# EAGLE board RGB_Station_v10_FusionPannel (EAGLE 7.7.0), part 1 of 2
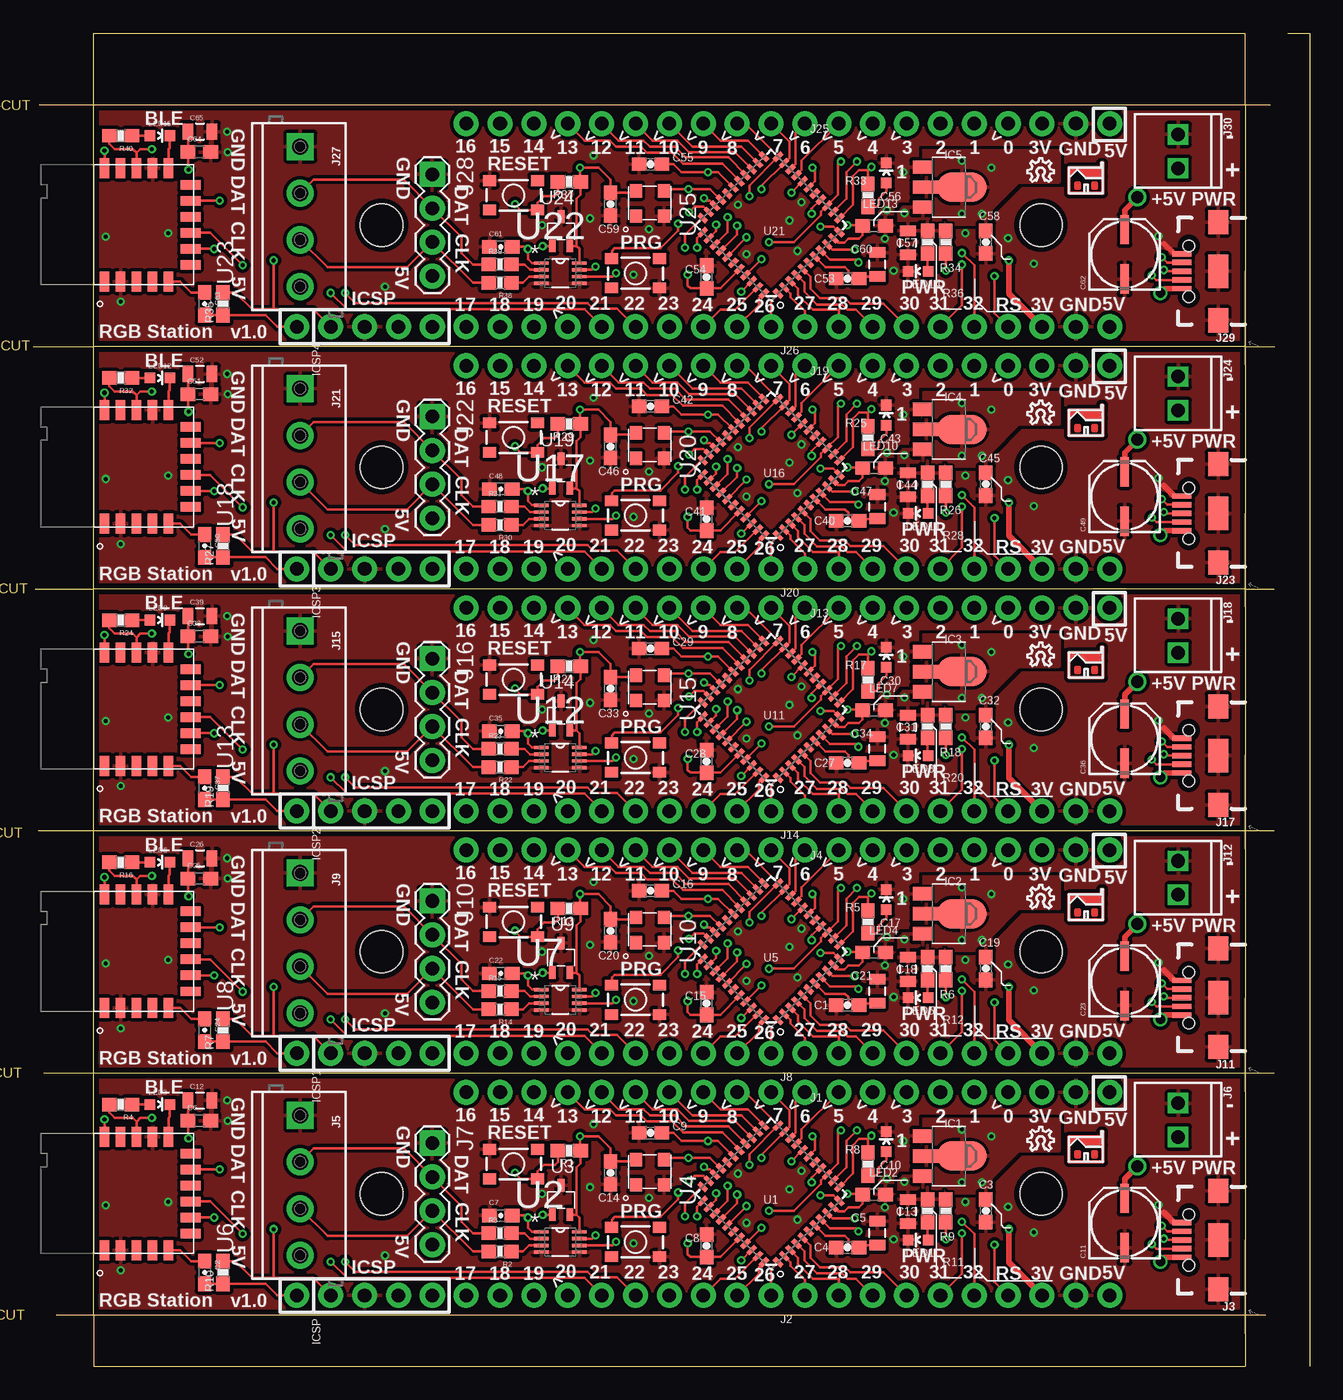
[diagram p0: board, top side]
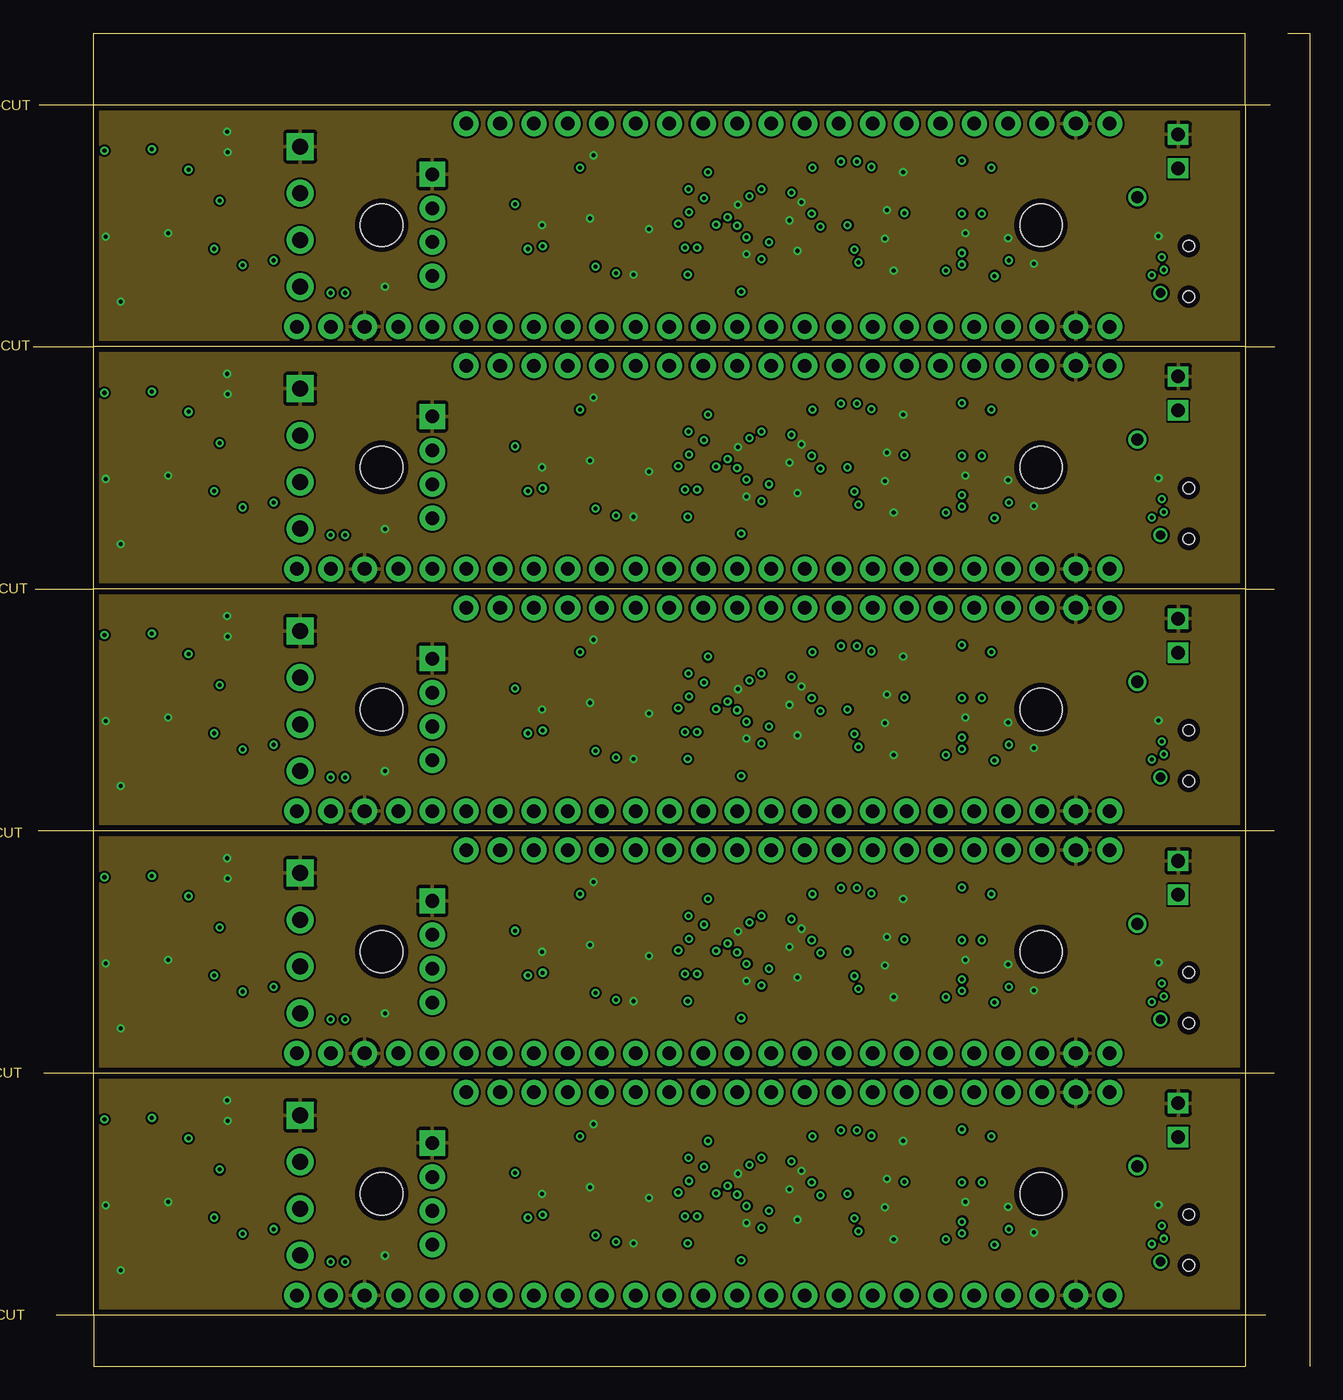
[diagram p1: board, inner layer Route2]
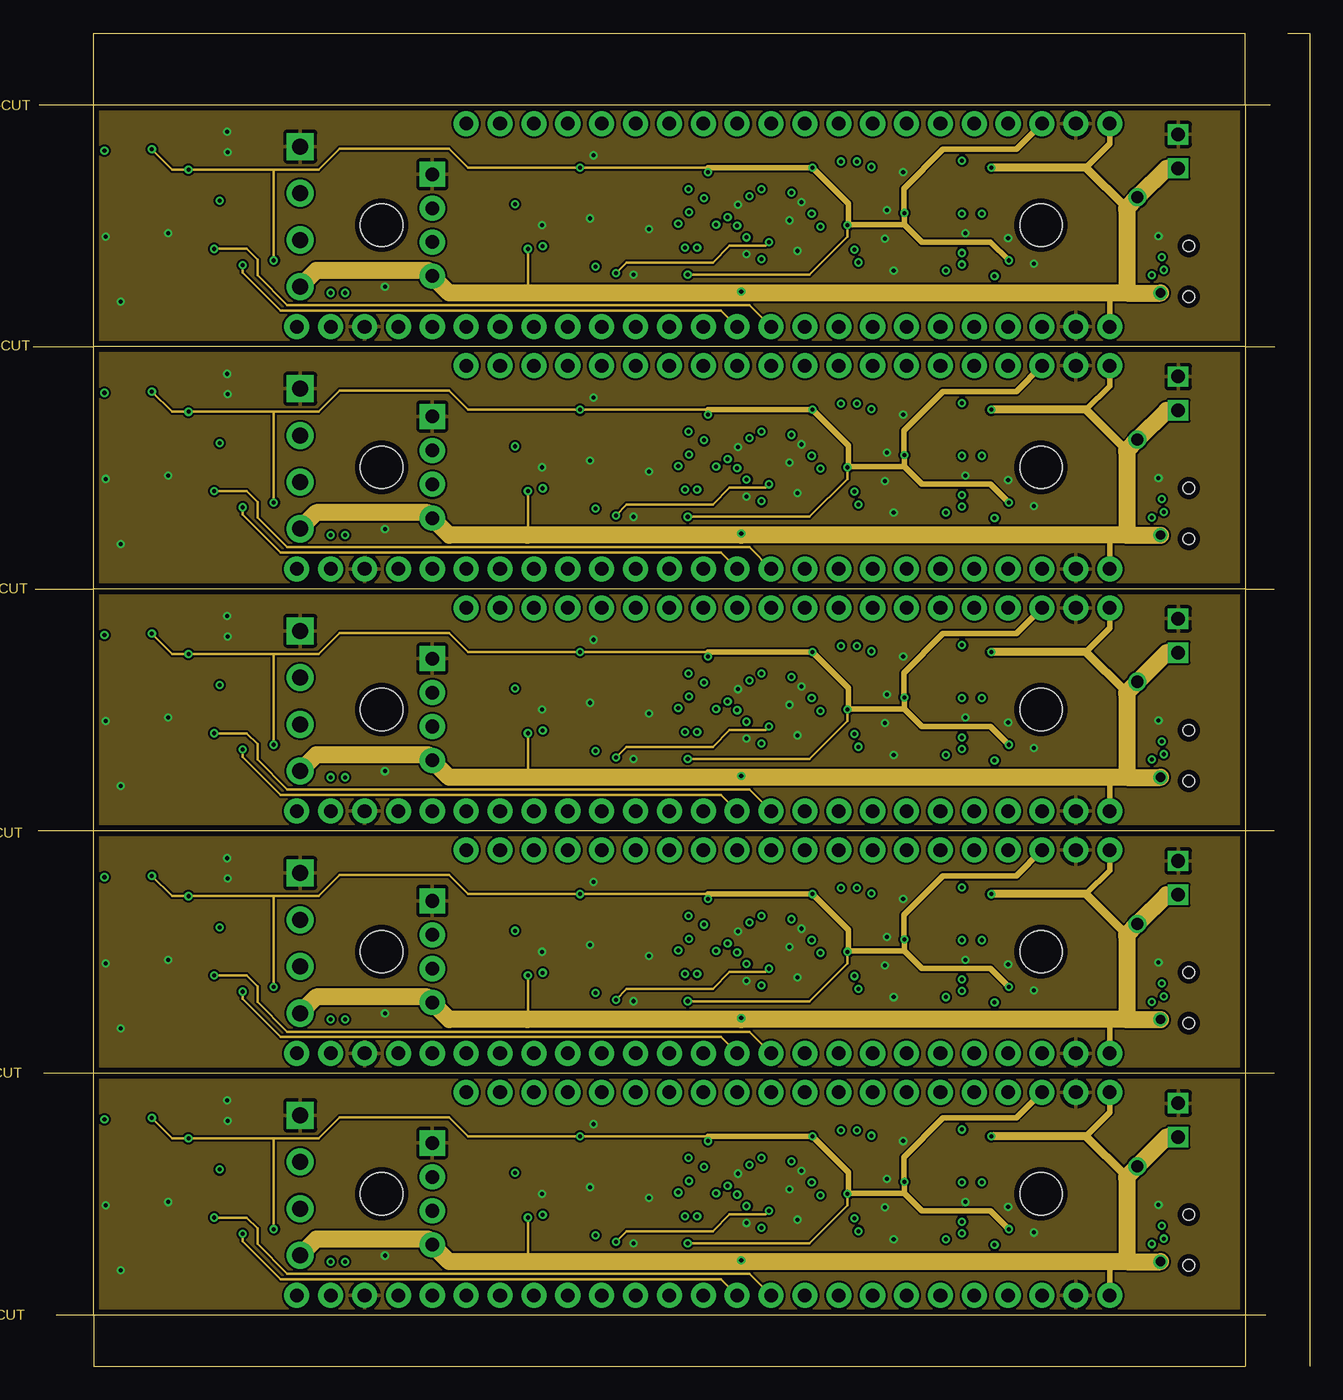
[diagram p2: board, inner layer Route15]
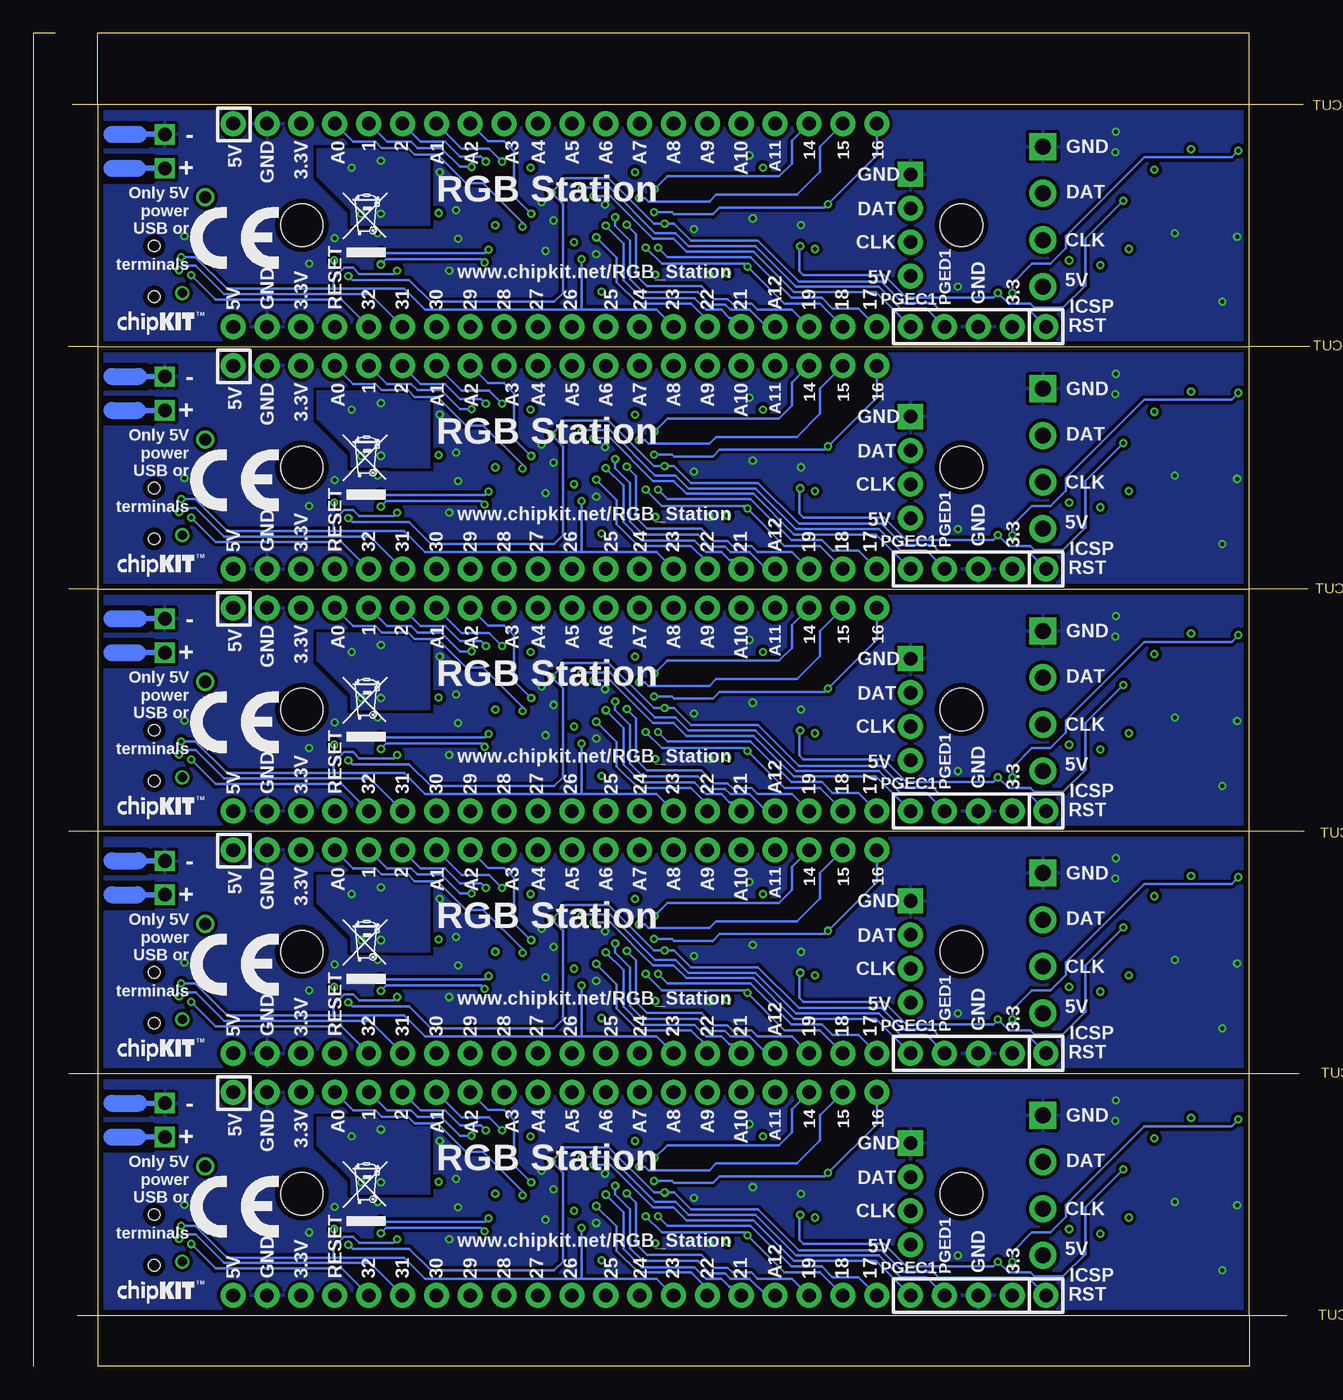
[diagram p3: board, bottom side, seen from below]

Size 95.71 x 99.95 mm. Coordinates in mm from the lower left corner, seen from the top.
Outline: 90.88,21.97 90.88,3.81
Outline: 90.88,3.81 4.52,3.81
Outline: 4.52,3.81 4.52,21.97
Outline: 90.88,40.13 90.88,21.97
Outline: 90.88,21.97 4.52,21.97
Outline: 4.52,21.97 4.52,40.13
Outline: 90.88,58.29 90.88,40.13
Outline: 90.88,40.13 4.52,40.13
Outline: 4.52,40.13 4.52,58.29
Outline: 90.88,76.45 90.88,58.29
Outline: 90.88,58.29 4.52,58.29
Outline: 4.52,58.29 4.52,76.45
Outline: 4.52,94.61 90.88,94.61
Outline: 90.88,94.61 90.88,76.45
Outline: 90.88,76.45 4.52,76.45
Outline: 4.52,76.45 4.52,94.61
Outline: 0.13,58.29 4.52,58.29
Outline: 90.88,58.29 93.06,58.29
Outline: 0,76.45 4.52,76.45
Outline: 90.88,76.45 93.08,76.45
Outline: 93.06,40.13 90.88,40.13
Outline: 4.52,40.13 0.38,40.13
Outline: 93.05,21.97 90.88,21.97
Outline: 4.52,21.97 0.76,21.97
Outline: 4.52,3.81 4.52,0 90.88,0 90.88,3.81
Outline: 90.88,94.61 90.88,99.95 4.52,99.95 4.52,94.61
Outline: 0.46,94.61 4.52,94.61
Outline: 90.88,94.61 92.78,94.61
Outline: 92.41,3.81 90.88,3.81
Outline: 4.52,3.81 1.73,3.81
Outline: 94.06,99.95 95.71,99.95 95.71,0
Copper layers (1*2*15*16): Top 0.035mm / dielectric 1.5mm / Route2 0.035mm / dielectric 0.15mm / Route15 0.035mm / dielectric 0.2mm / Bottom 0.035mm
Design rules "Fusion_eagle_rule_v1.1 *": minimum track width 6mil, minimum drill 12mil, track to track 6mil, track to pad 6mil, pad to pad 6mil, via to via 6mil, smd to smd 0mil, copper to edge 16mil, drill to drill 10mil, minimum pad ring 10mil, minimum via ring 6mil, stop-mask expansion 2mil, vias tented up to drill 100mil, thermal gap 10mil
Holes 3.17 mm at 26.11,12.92 75.57,12.92 26.11,31.08 75.57,31.08 26.11,49.24 75.57,49.24 26.11,67.4 75.57,67.4 26.11,85.56 75.57,85.56
bRestrict: area 87.2,19 to 90.6,20.4; area 86.8,16.3 to 90.7,18; area 87.2,37.2 to 90.6,38.5; area 86.8,34.4 to 90.7,36.2; area 87.2,55.3 to 90.6,56.7; area 86.8,52.6 to 90.7,54.4; area 87.2,73.5 to 90.6,74.9; area 86.8,70.8 to 90.7,72.5; area 87.2,91.7 to 90.6,93; area 86.8,88.9 to 90.7,90.7

## Footprints (pad centres in the part's own frame; a part is rotated, then mirrored left to right if it is on the bottom)
0603-CAP = smd 1.1 x 1: 1 -0.85,0; 2 0.85,0
0805 = smd 0.8 x 1.2: 1 -0.9,0; 2 0.9,0
0603 = smd 1.1 x 1: 1 -0.85,0; 2 0.85,0
PANASONIC_C = smd 2.2 x 0.65: + 1.9,-0.2; - -1.8,-0.2
SOT89 = smd 1 x 1.5: 1 -1.499,-1.981; 3 1.499,-1.981 | smd 1 x 2: 2 0,-1.727 | smd 2.2 x 3.7: 2@1 0,0.94
1X05_NOSILK = drill 1.016 pad 1.88: 1 0,0; 2 2.54,0; 3 5.08,0; 4 7.62,0; 5 10.16,0
1X20_NO_PIN1 = drill 1.016 pad 1.88: 1 -24.13,0; 2 -21.59,0; 3 -19.05,0; 4 -16.51,0; 5 -13.97,0; 6 -11.43,0; 7 -8.89,0; 8 -6.35,0; 9 -3.81,0; 10 -1.27,0; 11 1.27,0; 12 3.81,0; 13 6.35,0; 14 8.89,0; 15 11.43,0; 16 13.97,0; 17 16.51,0; 18 19.05,0; 19 21.59,0; 20 24.13,0
USB-B-MICRO-SMD = smd 1.45 x 0.4: D+ 2.725,0; D- 2.725,0.65; GND 2.725,-1.3; ID 2.725,-0.65; VBUS 2.725,1.3 | smd 1.5 x 1.8: SHIELD1 0,3.685; SHIELD2 0,-3.685 | smd 1.5 x 2.5: SHIELD3 0,0 | hole 0.85: 2.2,1.9; 2.2,-1.9
SCREWTERMINAL-3.5MM-4@1 = drill 1.2 pad 2.032 square: 1 0,0 | drill 1.2 pad 2.032: 2 3.5,0; 3 7,0; 4 10.5,0
1X02_2.54_SCREWTERM = drill 1.016 square: P1 2.54,0; P2 0,0
1X04 = drill 1.016 pad 1.88 square: 1 0,0 | drill 1.016 pad 1.88: 2 2.54,0; 3 5.08,0; 4 7.62,0
LED-0603 = smd 0.8 x 0.8: A 0,-0.75; C 0,0.75
0603-RES = smd 1.1 x 1: 1 -0.85,0; 2 0.85,0
TACTILE_SWITCH_SMD-3 = smd 1 x 0.8: 1 -1.8,1.1; 2 1.8,1.1; 3 -1.8,-1.1; 4 1.8,-1.1
QFN-44-8X8-NOPAD = smd 0.8 x 0.35: 1 -4,3.25; 2 -4,2.6; 3 -4,1.95; 4 -4,1.3; 5 -4,0.65; 6 -4,0; 7 -4,-0.65; 8 -4,-1.3; 9 -4,-1.95; 10 -4,-2.6; 11 -4,-3.25; 23 4,-3.25; 24 4,-2.6; 25 4,-1.95; 26 4,-1.3; 27 4,-0.65; 28 4,0; 29 4,0.65; 30 4,1.3; 31 4,1.95; 32 4,2.6; 33 4,3.25 | smd 0.35 x 0.8: 12 -3.25,-4; 13 -2.6,-4; 14 -1.95,-4; 15 -1.3,-4; 16 -0.65,-4; 17 0,-4; 18 0.65,-4; 19 1.3,-4; 20 1.95,-4; 21 2.6,-4; 22 3.25,-4; 34 3.25,4; 35 2.6,4; 36 1.95,4; 37 1.3,4; 38 0.65,4; 39 0,4; 40 -0.65,4; 41 -1.3,4; 42 -1.95,4; 43 -2.6,4; 44 -3.25,4
VSSOP8 = smd 1.067 x 0.254: 1 -1.422,0.762; 2 -1.422,0.254; 3 -1.422,-0.254; 4 -1.422,-0.762; 5 1.422,-0.762; 6 1.422,-0.254; 7 1.422,0.254; 8 1.422,0.762
SC70 = smd 0.5 x 0.95: P1 0.65,1.1; P2 -0.65,1.1; P3 0,-1.1
CDFN-4_3.2X2.5 = smd 1 x 0.9: P1 -0.95,1.05; P2 -0.95,-1.05; P3 0.95,-1.05; P4 0.95,1.05
RN4871 = smd 1.5 x 0.7: 1 0.25,6.7; 2 0.25,5.5; 3 0.25,4.3; 4 0.25,3.1; 5 0.25,1.9; 12 8.75,1.9; 13 8.75,3.1; 14 8.75,4.3; 15 8.75,5.5; 16 8.75,6.7 | smd 0.7 x 1.5: 6 1.5,0.25; 7 2.7,0.25; 8 3.9,0.25; 9 5.1,0.25; 10 6.3,0.25; 11 7.5,0.25

## Placement (x,y rotation side)
C1  0.1uF  [0603-CAP]  61.06,27.07 180 top
C2  .1uF  [0603-CAP]  12.85,7.03 270 top
C3  1uF  [0603-CAP]  71.42,11.65 270 top
C4  0.1uF  [0603-CAP]  61.06,8.91 180 top
C5  10uF  [0805]  63.3,9.97 90 top
C6  0.1uF  [0603]  12.45,18.41 0 top
C7  .1uF  [0603-CAP]  35.05,11.29 0 top
C8  0.1uF  [0603-CAP]  50.49,9.03 90 top
C9  0.1uF  [0603-CAP]  46.28,17.49 180 top
C10  0.1uF  [0603]  63.04,12.87 0 top
C11  100uF  [PANASONIC_C]  81.64,10.68 90 top
C12  10uF  [0805]  12.5,19.93 0 top
C13  10uF  [0805]  65.58,11.6 270 top
C14  .1uF  [0603-CAP]  43.28,14.49 90 top
C15  0.1uF  [0603-CAP]  50.49,27.19 90 top
C16  0.1uF  [0603-CAP]  46.28,35.65 180 top
C17  0.1uF  [0603]  63.04,31.03 0 top
C18  10uF  [0805]  65.58,29.76 270 top
C19  1uF  [0603-CAP]  71.42,29.81 270 top
C20  .1uF  [0603-CAP]  43.28,32.65 90 top
C21  10uF  [0805]  63.3,28.13 90 top
C22  .1uF  [0603-CAP]  35.05,29.45 0 top
C23  100uF  [PANASONIC_C]  81.64,28.84 90 top
C24  .1uF  [0603-CAP]  12.85,25.19 270 top
C25  0.1uF  [0603]  12.45,36.57 0 top
C26  10uF  [0805]  12.5,38.09 0 top
C27  0.1uF  [0603-CAP]  61.06,45.23 180 top
C28  0.1uF  [0603-CAP]  50.49,45.35 90 top
C29  0.1uF  [0603-CAP]  46.28,53.81 180 top
C30  0.1uF  [0603]  63.04,49.19 0 top
C31  10uF  [0805]  65.58,47.92 270 top
C32  1uF  [0603-CAP]  71.42,47.97 270 top
C33  .1uF  [0603-CAP]  43.28,50.82 90 top
C34  10uF  [0805]  63.3,46.29 90 top
C35  .1uF  [0603-CAP]  35.05,47.62 0 top
C36  100uF  [PANASONIC_C]  81.64,47.01 90 top
C37  .1uF  [0603-CAP]  12.85,43.35 270 top
C38  0.1uF  [0603]  12.45,54.73 0 top
C39  10uF  [0805]  12.5,56.25 0 top
C40  0.1uF  [0603-CAP]  61.06,63.39 180 top
C41  0.1uF  [0603-CAP]  50.49,63.51 90 top
C42  0.1uF  [0603-CAP]  46.28,71.97 180 top
C43  0.1uF  [0603]  63.04,67.35 0 top
C44  10uF  [0805]  65.58,66.08 270 top
C45  1uF  [0603-CAP]  71.42,66.13 270 top
C46  .1uF  [0603-CAP]  43.28,68.98 90 top
C47  10uF  [0805]  63.3,64.46 90 top
C48  .1uF  [0603-CAP]  35.05,65.78 0 top
C49  100uF  [PANASONIC_C]  81.64,65.17 90 top
C50  .1uF  [0603-CAP]  12.85,61.51 270 top
C51  0.1uF  [0603]  12.45,72.89 0 top
C52  10uF  [0805]  12.5,74.41 0 top
C53  0.1uF  [0603-CAP]  61.06,81.55 180 top
C54  0.1uF  [0603-CAP]  50.49,81.67 90 top
C55  0.1uF  [0603-CAP]  46.28,90.14 180 top
C56  0.1uF  [0603]  63.04,85.51 0 top
C57  10uF  [0805]  65.58,84.24 270 top
C58  1uF  [0603-CAP]  71.42,84.29 270 top
C59  .1uF  [0603-CAP]  43.28,87.14 90 top
C60  10uF  [0805]  63.3,82.62 90 top
C61  .1uF  [0603-CAP]  35.05,83.94 0 top
C62  100uF  [PANASONIC_C]  81.64,83.33 90 top
C63  .1uF  [0603-CAP]  12.85,79.67 270 top
C64  0.1uF  [0603]  12.45,91.05 0 top
C65  10uF  [0805]  12.5,92.57 0 top
IC1  MCP1702T-3302E/MB  [SOT89]  68.68,15.76 270 top
IC2  MCP1702T-3302E/MB  [SOT89]  68.68,33.92 270 top
IC3  MCP1702T-3302E/MB  [SOT89]  68.68,52.09 270 top
IC4  MCP1702T-3302E/MB  [SOT89]  68.68,70.25 270 top
IC5  MCP1702T-3302E/MB  [SOT89]  68.68,88.41 270 top
ICSP  J3  [1X05_NOSILK]  19.76,5.3 0 top
ICSP1  J3  [1X05_NOSILK]  19.76,23.46 0 top
ICSP2  J3  [1X05_NOSILK]  19.76,41.62 0 top
ICSP3  J3  [1X05_NOSILK]  19.76,59.78 0 top
ICSP4  J3  [1X05_NOSILK]  19.76,77.94 0 top
J1  M20  [1X20_NO_PIN1]  56.59,20.54 180 top
J2  M20  [1X20_NO_PIN1]  56.59,5.3 0 top
J3  USB_MICRO  [USB-B-MICRO-SMD]  88.85,9.46 180 top
J4  M20  [1X20_NO_PIN1]  56.59,38.7 180 top
J5  [SCREWTERMINAL-3.5MM-4@1]  20.02,18.81 270 top
J6  [1X02_2.54_SCREWTERM]  85.85,19.73 270 top
J7  [1X04]  29.92,16.73 270 top
J8  M20  [1X20_NO_PIN1]  56.59,23.46 0 top
J9  [SCREWTERMINAL-3.5MM-4@1]  20.02,36.97 270 top
J10  [1X04]  29.92,34.89 270 top
J11  USB_MICRO  [USB-B-MICRO-SMD]  88.85,27.63 180 top
J12  [1X02_2.54_SCREWTERM]  85.85,37.89 270 top
J13  M20  [1X20_NO_PIN1]  56.59,56.86 180 top
J14  M20  [1X20_NO_PIN1]  56.59,41.62 0 top
J15  [SCREWTERMINAL-3.5MM-4@1]  20.02,55.13 270 top
J16  [1X04]  29.92,53.05 270 top
J17  USB_MICRO  [USB-B-MICRO-SMD]  88.85,45.79 180 top
J18  [1X02_2.54_SCREWTERM]  85.85,56.05 270 top
J19  M20  [1X20_NO_PIN1]  56.59,75.02 180 top
J20  M20  [1X20_NO_PIN1]  56.59,59.78 0 top
J21  [SCREWTERMINAL-3.5MM-4@1]  20.02,73.29 270 top
J22  [1X04]  29.92,71.21 270 top
J23  USB_MICRO  [USB-B-MICRO-SMD]  88.85,63.95 180 top
J24  [1X02_2.54_SCREWTERM]  85.85,74.21 270 top
J25  M20  [1X20_NO_PIN1]  56.59,93.18 180 top
J26  M20  [1X20_NO_PIN1]  56.59,77.94 0 top
J27  [SCREWTERMINAL-3.5MM-4@1]  20.02,91.46 270 top
J28  [1X04]  29.92,89.37 270 top
J29  USB_MICRO  [USB-B-MICRO-SMD]  88.85,82.11 180 top
J30  [1X02_2.54_SCREWTERM]  85.85,92.37 270 top
LED1  RED  [LED-0603]  66.34,9.46 90 top
LED2  GREEN  [LED-0603]  63.96,16.83 0 top
LED3  Blue  [LED-0603]  9.5,19.62 270 top
LED4  GREEN  [LED-0603]  63.96,34.99 0 top
LED5  RED  [LED-0603]  66.34,27.63 90 top
LED6  Blue  [LED-0603]  9.5,37.79 270 top
LED7  GREEN  [LED-0603]  63.96,53.15 0 top
LED8  RED  [LED-0603]  66.34,45.79 90 top
LED9  Blue  [LED-0603]  9.5,55.95 270 top
LED10  GREEN  [LED-0603]  63.96,71.31 0 top
LED11  RED  [LED-0603]  66.34,63.95 90 top
LED12  Blue  [LED-0603]  9.5,74.11 270 top
LED13  GREEN  [LED-0603]  63.96,89.47 0 top
LED14  RED  [LED-0603]  66.34,82.11 90 top
LED15  Blue  [LED-0603]  9.5,92.27 270 top
LOGO1  OSHW_LOGO_8MILX0070-NT  [OSHW_8X70_NOTEXT]  74.55,16.16 0 top
LOGO2  OSHW_LOGO_8MILX0070-NT  [OSHW_8X70_NOTEXT]  74.55,34.33 0 top
LOGO3  OSHW_LOGO_8MILX0070-NT  [OSHW_8X70_NOTEXT]  74.55,52.49 0 top
LOGO4  OSHW_LOGO_8MILX0070-NT  [OSHW_8X70_NOTEXT]  74.55,70.65 0 top
LOGO5  OSHW_LOGO_8MILX0070-NT  [OSHW_8X70_NOTEXT]  74.55,88.81 0 top
R1  10K  [0603-RES]  40.18,16.17 180 top
R2  333  [0603-RES]  35,8.6 180 top
R3  333  [0603-RES]  35,9.97 0 top
R4  1K  [0603-RES]  6.55,19.62 180 top
R5  1K  [0603-RES]  62.59,33.32 270 top
R6  10K  [0603-RES]  68.43,29.81 90 top
R7  10K  [0603-RES]  14.22,25.19 270 top
R8  1K  [0603-RES]  62.59,15.15 270 top
R9  10K  [0603-RES]  68.43,11.65 90 top
R10  10K  [0603-RES]  14.22,7.03 270 top
R11  1K  [0603-RES]  67.06,11.65 90 top
R12  1K  [0603-RES]  67.06,29.81 90 top
R13  10K  [0603-RES]  40.18,34.33 180 top
R14  333  [0603-RES]  35,26.76 180 top
R15  333  [0603-RES]  35,28.13 0 top
R16  1K  [0603-RES]  6.55,37.79 180 top
R17  1K  [0603-RES]  62.59,51.48 270 top
R18  10K  [0603-RES]  68.43,47.97 90 top
R19  10K  [0603-RES]  14.22,43.35 270 top
R20  1K  [0603-RES]  67.06,47.97 90 top
R21  10K  [0603-RES]  40.18,52.49 180 top
R22  333  [0603-RES]  35,44.92 180 top
R23  333  [0603-RES]  35,46.29 0 top
R24  1K  [0603-RES]  6.55,55.95 180 top
R25  1K  [0603-RES]  62.59,69.64 270 top
R26  10K  [0603-RES]  68.43,66.13 90 top
R27  10K  [0603-RES]  14.22,61.51 270 top
R28  1K  [0603-RES]  67.06,66.13 90 top
R29  10K  [0603-RES]  40.18,70.65 180 top
R30  333  [0603-RES]  35,63.08 180 top
R31  333  [0603-RES]  35,64.46 0 top
R32  1K  [0603-RES]  6.55,74.11 180 top
R33  1K  [0603-RES]  62.59,87.8 270 top
R34  10K  [0603-RES]  68.43,84.29 90 top
R35  10K  [0603-RES]  14.22,79.67 270 top
R36  1K  [0603-RES]  67.06,84.29 90 top
R37  10K  [0603-RES]  40.18,88.81 180 top
R38  333  [0603-RES]  35,81.25 180 top
R39  333  [0603-RES]  35,82.62 0 top
R40  1K  [0603-RES]  6.55,92.27 180 top
S1  SWITCH-MOMENTARY-SPSTSMD-3  [TACTILE_SWITCH_SMD-3]  36.02,15.15 0 top
S2  SWITCH-MOMENTARY-SPSTSMD-3  [TACTILE_SWITCH_SMD-3]  45.16,9.31 180 top
S3  SWITCH-MOMENTARY-SPSTSMD-3  [TACTILE_SWITCH_SMD-3]  36.02,33.32 0 top
S4  SWITCH-MOMENTARY-SPSTSMD-3  [TACTILE_SWITCH_SMD-3]  45.16,27.47 180 top
S5  SWITCH-MOMENTARY-SPSTSMD-3  [TACTILE_SWITCH_SMD-3]  36.02,51.48 0 top
S6  SWITCH-MOMENTARY-SPSTSMD-3  [TACTILE_SWITCH_SMD-3]  45.16,45.63 180 top
S7  SWITCH-MOMENTARY-SPSTSMD-3  [TACTILE_SWITCH_SMD-3]  36.02,69.64 0 top
S8  SWITCH-MOMENTARY-SPSTSMD-3  [TACTILE_SWITCH_SMD-3]  45.16,63.8 180 top
S9  SWITCH-MOMENTARY-SPSTSMD-3  [TACTILE_SWITCH_SMD-3]  36.02,87.8 0 top
S10  SWITCH-MOMENTARY-SPSTSMD-3  [TACTILE_SWITCH_SMD-3]  45.16,81.96 180 top
U1  PIC32MX270F256D_44VTLA_44  [QFN-44-8X8-NOPAD]  55.32,12.92 135 top
U2  74LVC2T45  [VSSOP8]  39.52,9.31 0 top
U3  MCP121T-315E/TT  [SC70]  39.57,12.46 180 top
U4  DSC6111CI1A-008.0000  [CDFN-4_3.2X2.5]  46.23,14.54 90 top
U5  PIC32MX270F256D_44VTLA_44  [QFN-44-8X8-NOPAD]  55.32,31.08 135 top
U6  RN4871  [RN4871]  12.04,8.45 90 top
U7  74LVC2T45  [VSSOP8]  39.52,27.47 0 top
U8  RN4871  [RN4871]  12.04,26.61 90 top
U9  MCP121T-315E/TT  [SC70]  39.57,30.62 180 top
U10  DSC6111CI1A-008.0000  [CDFN-4_3.2X2.5]  46.23,32.71 90 top
U11  PIC32MX270F256D_44VTLA_44  [QFN-44-8X8-NOPAD]  55.32,49.24 135 top
U12  74LVC2T45  [VSSOP8]  39.52,45.63 0 top
U13  RN4871  [RN4871]  12.04,44.77 90 top
U14  MCP121T-315E/TT  [SC70]  39.57,48.78 180 top
U15  DSC6111CI1A-008.0000  [CDFN-4_3.2X2.5]  46.23,50.87 90 top
U16  PIC32MX270F256D_44VTLA_44  [QFN-44-8X8-NOPAD]  55.32,67.4 135 top
U17  74LVC2T45  [VSSOP8]  39.52,63.8 0 top
U18  RN4871  [RN4871]  12.04,62.93 90 top
U19  MCP121T-315E/TT  [SC70]  39.57,66.94 180 top
U20  DSC6111CI1A-008.0000  [CDFN-4_3.2X2.5]  46.23,69.03 90 top
U21  PIC32MX270F256D_44VTLA_44  [QFN-44-8X8-NOPAD]  55.32,85.56 135 top
U22  74LVC2T45  [VSSOP8]  39.52,81.96 0 top
U23  RN4871  [RN4871]  12.04,81.09 90 top
U24  MCP121T-315E/TT  [SC70]  39.57,85.11 180 top
U25  DSC6111CI1A-008.0000  [CDFN-4_3.2X2.5]  46.23,87.19 90 top
U$1  CE_MARK5MM  [CE_5MM]  80.59,30.17 0 bottom
U$2  CE_MARK5MM  [CE_5MM]  80.59,12.01 0 bottom
U$3  ROSH_GARBAGE  [ROHS_GARBAGE_5MM]  72.49,10.52 0 bottom
U$4  CHIPKIT2MM  [CHIPKIT_2MM]  89.51,4.67 0 bottom
U$5  SCHMALZHAUSSCHMALZHAUS_SMALL  [SCHMALZHAUS_SMALL]  78.94,15.31 0 top
U$6  ROSH_GARBAGE  [ROHS_GARBAGE_5MM]  72.49,28.68 0 bottom
U$7  CHIPKIT2MM  [CHIPKIT_2MM]  89.51,22.84 0 bottom
U$8  SCHMALZHAUSSCHMALZHAUS_SMALL  [SCHMALZHAUS_SMALL]  78.94,33.47 0 top
U$9  CE_MARK5MM  [CE_5MM]  80.59,48.34 0 bottom
U$10  ROSH_GARBAGE  [ROHS_GARBAGE_5MM]  72.49,46.84 0 bottom
U$11  CHIPKIT2MM  [CHIPKIT_2MM]  89.51,41 0 bottom
U$12  SCHMALZHAUSSCHMALZHAUS_SMALL  [SCHMALZHAUS_SMALL]  78.94,51.63 0 top
U$13  CE_MARK5MM  [CE_5MM]  80.59,66.5 0 bottom
U$14  ROSH_GARBAGE  [ROHS_GARBAGE_5MM]  72.49,65 0 bottom
U$15  CHIPKIT2MM  [CHIPKIT_2MM]  89.51,59.16 0 bottom
U$16  SCHMALZHAUSSCHMALZHAUS_SMALL  [SCHMALZHAUS_SMALL]  78.94,69.79 0 top
U$17  CE_MARK5MM  [CE_5MM]  80.59,84.66 0 bottom
U$18  ROSH_GARBAGE  [ROHS_GARBAGE_5MM]  72.49,83.17 0 bottom
U$19  CHIPKIT2MM  [CHIPKIT_2MM]  89.51,77.32 0 bottom
U$20  SCHMALZHAUSSCHMALZHAUS_SMALL  [SCHMALZHAUS_SMALL]  78.94,87.95 0 top

## Library data of the parts
C1 C3 C4 C8 C9 C14-C16 C19 C20 C27-C29 C32 C33 C40-C42 C45 C46 C53-C55 C58 C59 LED1-LED15 R1 R4-R13 R16-R21 R24-R29 R32-R37 R40 = SparkFun
C2 C7 C11 C22-C24 C35-C37 C48-C50 C61-C63 = SparkFun-Capacitors
C5 C12 C21 C26 C34 C39 C47 C52 C60 C65 ICSP ICSP1-ICSP4 J1 J2 J4 J8 J13 J14 J19 J20 J25 J26 U1 U5 U11 U16 U21 U$5 U$8 U$12 U$16 U$20 = SchmalzHaus
C6 C10 C13 C17 C18 C25 C30 C31 C38 C43 C44 C51 C56 C57 C64 = SparkFun02-20-08
IC1-IC5 = linear
J3 J11 J17 J23 J29 = SparkFun-Connectors; PROD_ID: CONN-11752
J5 J9 J15 J21 J27 = SparkFun-Connectors; PROD_ID: 2xCONN-08399; SF_ID: 2xPRT-08084
J6 J12 J18 J24 J30 = SparkFun-Connectors
J7 J10 J16 J22 J28 = SparkFun-Connectors; PROD_ID: CONN-09696
LOGO1-LOGO5 = OSHW
R2 R3 R14 R15 R22 R23 R30 R31 R38 R39 = SparkFun-Resistors
S1-S10 = SparkFun-Retired
U2 U7 U12 U17 U22 = 74LVCH2T45DC
U3 U9 U14 U19 U24 = MCP1x2_ResetController
U4 U10 U15 U20 U25 = DSC61XX
U6 U8 U13 U18 U23 = RN4870-71
U$1-U$4 U$6 U$7 U$9-U$11 U$13-U$15 U$17-U$19 = SchmalzHausPublic

## Nets
3.3V: C6.1 C8.1 C9.1 C10.1 C12.1 C13.1 C14.2 IC1.3 ICSP.2 J1.3 J2.18 R1.1 R4.2 R9.2 R10.1 R11.2 U1.10 U1.17 U1.28 U1.40 U2.8 U3.P2 U4.P4 U6.14
3.3V1: C15.1 C16.1 C17.1 C18.1 C20.2 C25.1 C26.1 IC2.3 ICSP1.2 J4.3 J8.18 R6.2 R7.1 R12.2 R13.1 R16.2 U5.10 U5.17 U5.28 U5.40 U7.8 U8.14 U9.P2 U10.P4
3.3V2: C28.1 C29.1 C30.1 C31.1 C33.2 C38.1 C39.1 IC3.3 ICSP2.2 J13.3 J14.18 R18.2 R19.1 R20.2 R21.1 R24.2 U11.10 U11.17 U11.28 U11.40 U12.8 U13.14 U14.P2 U15.P4
3.3V3: C41.1 C42.1 C43.1 C44.1 C46.2 C51.1 C52.1 IC4.3 ICSP3.2 J19.3 J20.18 R26.2 R27.1 R28.2 R29.1 R32.2 U16.10 U16.17 U16.28 U16.40 U17.8 U18.14 U19.P2 U20.P4
3.3V4: C54.1 C55.1 C56.1 C57.1 C59.2 C64.1 C65.1 IC5.3 ICSP4.2 J25.3 J26.18 R34.2 R35.1 R36.2 R37.1 R40.2 U21.10 U21.17 U21.28 U21.40 U22.8 U23.14 U24.P2 U25.P4
5V: C3.1 C7.2 C11.+ IC1.2 IC1.2@1 J1.1 J2.20 J3.VBUS J5.4 J6.P1 J7.4 U1.42 U2.1
5V1: C19.1 C22.2 C23.+ IC2.2 IC2.2@1 J4.1 J8.20 J9.4 J10.4 J11.VBUS J12.P1 U5.42 U7.1
5V2: C32.1 C35.2 C36.+ IC3.2 IC3.2@1 J13.1 J14.20 J15.4 J16.4 J17.VBUS J18.P1 U11.42 U12.1
5V3: C45.1 C48.2 C49.+ IC4.2 IC4.2@1 J19.1 J20.20 J21.4 J22.4 J23.VBUS J24.P1 U16.42 U17.1
5V4: C58.1 C61.2 C62.+ IC5.2 IC5.2@1 J25.1 J26.20 J27.4 J28.4 J29.VBUS J30.P1 U21.42 U22.1
!MCLR!: C2.2 ICSP.1 J2.17 R10.2 S2.4 U1.18
!MCLR!1: C24.2 ICSP1.1 J8.17 R7.2 S4.4 U5.18
!MCLR!2: C37.2 ICSP2.1 J14.17 R19.2 S6.4 U11.18
!MCLR!3: C50.2 ICSP3.1 J20.17 R27.2 S8.4 U16.18
!MCLR!4: C63.2 ICSP4.1 J26.17 R35.2 S10.4 U21.18
BT_MODE: J2.5 U1.37 U6.16
BT_MODE1: J8.5 U5.37 U8.16
BT_MODE2: J14.5 U11.37 U13.16
BT_MODE3: J20.5 U16.37 U18.16
BT_MODE4: J26.5 U21.37 U23.16
BT_RX: J2.10 U1.1 U6.7
BT_RX1: J8.10 U5.1 U8.7
BT_RX2: J14.10 U11.1 U13.7
BT_RX3: J20.10 U16.1 U18.7
BT_RX4: J26.10 U21.1 U23.7
BT_TX: J2.9 U1.44 U6.8
BT_TX1: J8.9 U5.44 U8.8
BT_TX2: J14.9 U11.44 U13.8
BT_TX3: J20.9 U16.44 U18.8
BT_TX4: J26.9 U21.44 U23.8
D+/RB1: J8.15 J11.D+ U5.8
D+/RB2: J14.15 J17.D+ U11.8
D+/RB3: J20.15 J23.D+ U16.8
D+/RB4: J26.15 J29.D+ U21.8
D+/RB10: J2.15 J3.D+ U1.8
D-/RB1: J8.16 J11.D- U5.9
D-/RB2: J14.16 J17.D- U11.9
D-/RB3: J20.16 J23.D- U16.9
D-/RB4: J26.16 J29.D- U21.9
D-/RB11: J2.16 J3.D- U1.9
GND: C3.2 C4.2 C5.2 C6.2 C7.1 C8.2 C9.2 C10.2 C11.- C12.2 C13.2 C14.1 IC1.1 ICSP.3 J1.2 J2.19 J3.GND J3.SHIELD1 J3.SHIELD2 J3.SHIELD3 J5.1 J6.P2 J7.1 LED1.C LED2.C S1.1 S2.1 U1.6 U1.16 U1.29 U1.39 U2.4 U2.5 U3.P3 U4.P2 U6.2 U6.13
GND1: C1.2 C15.2 C16.2 C17.2 C18.2 C19.2 C20.1 C21.2 C22.1 C23.- C25.2 C26.2 IC2.1 ICSP1.3 J4.2 J8.19 J9.1 J10.1 J11.GND J11.SHIELD1 J11.SHIELD2 J11.SHIELD3 J12.P2 LED4.C LED5.C S3.1 S4.1 U5.6 U5.16 U5.29 U5.39 U7.4 U7.5 U8.2 U8.13 U9.P3 U10.P2
GND2: C27.2 C28.2 C29.2 C30.2 C31.2 C32.2 C33.1 C34.2 C35.1 C36.- C38.2 C39.2 IC3.1 ICSP2.3 J13.2 J14.19 J15.1 J16.1 J17.GND J17.SHIELD1 J17.SHIELD2 J17.SHIELD3 J18.P2 LED7.C LED8.C S5.1 S6.1 U11.6 U11.16 U11.29 U11.39 U12.4 U12.5 U13.2 U13.13 U14.P3 U15.P2
GND3: C40.2 C41.2 C42.2 C43.2 C44.2 C45.2 C46.1 C47.2 C48.1 C49.- C51.2 C52.2 IC4.1 ICSP3.3 J19.2 J20.19 J21.1 J22.1 J23.GND J23.SHIELD1 J23.SHIELD2 J23.SHIELD3 J24.P2 LED10.C LED11.C S7.1 S8.1 U16.6 U16.16 U16.29 U16.39 U17.4 U17.5 U18.2 U18.13 U19.P3 U20.P2
GND4: C53.2 C54.2 C55.2 C56.2 C57.2 C58.2 C59.1 C60.2 C61.1 C62.- C64.2 C65.2 IC5.1 ICSP4.3 J25.2 J26.19 J27.1 J28.1 J29.GND J29.SHIELD1 J29.SHIELD2 J29.SHIELD3 J30.P2 LED13.C LED14.C S9.1 S10.1 U21.6 U21.16 U21.29 U21.39 U22.4 U22.5 U23.2 U23.13 U24.P3 U25.P2
LED_CLOCK: J1.7 U1.14 U2.6
LED_CLOCK1: J4.7 U5.14 U7.6
LED_CLOCK2: J13.7 U11.14 U12.6
LED_CLOCK3: J19.7 U16.14 U17.6
LED_CLOCK4: J25.7 U21.14 U22.6
LED_DATA: J2.2 U1.34 U2.7
LED_DATA1: J8.2 U5.34 U7.7
LED_DATA2: J14.2 U11.34 U12.7
LED_DATA3: J20.2 U16.34 U17.7
LED_DATA4: J26.2 U21.34 U22.7
N$1: LED5.A R12.1
N$2: J5.2 J7.2 R3.1
N$3: R3.2 U2.2
N$4: J5.3 J7.3 R2.2
N$5: J9.3 J10.3 R14.2
N$6: LED1.A R11.1
N$7: R14.1 U7.3
N$8: C2.1 U6.5
N$9: LED3.C U6.12
N$10: LED3.A R4.1
N$11: LED2.A R8.2
N$12: J9.2 J10.2 R15.1
N$13: R15.2 U7.2
N$14: LED6.C U8.12
N$15: LED6.A R16.1
N$16: C24.1 U8.5
N$17: LED4.A R5.2
N$18: LED8.A R20.1
N$19: J15.3 J16.3 R22.2
N$20: R22.1 U12.3
N$21: J15.2 J16.2 R23.1
N$22: R23.2 U12.2
N$23: R2.1 U2.3
N$24: LED9.C U13.12
N$25: LED9.A R24.1
N$26: C37.1 U13.5
N$27: LED7.A R17.2
N$28: LED11.A R28.1
N$29: J21.3 J22.3 R30.2
N$30: R30.1 U17.3
N$31: J21.2 J22.2 R31.1
N$32: R31.2 U17.2
N$33: LED12.C U18.12
N$34: LED12.A R32.1
N$35: C50.1 U18.5
N$36: LED10.A R25.2
N$37: LED14.A R36.1
N$38: J27.3 J28.3 R38.2
N$39: R38.1 U22.3
N$40: J27.2 J28.2 R39.1
N$41: R39.2 U22.2
N$42: LED15.C U23.12
N$43: LED15.A R40.1
N$44: C63.1 U23.5
N$45: LED13.A R33.2
RA0: J1.9 U1.19
RA1: J1.10 U1.20
RA2: J1.18 U1.30 U4.P3
RA3: J1.19 U1.31
RA4: J4.19 U5.31
RA5: J4.18 U5.30 U10.P3
RA6: J8.3 U5.35
RA7: J1.6 U1.13
RA8: J1.20 R1.2 S1.4 U1.32
RA9: J2.3 U1.35
RA10: J1.5 R8.1 U1.12
RA11: J4.20 R13.2 S3.4 U5.32
RA12: J4.5 R5.1 U5.12
RA13: J4.6 U5.13
RA14: J4.9 U5.19
RA15: J4.10 U5.20
RA16: J13.19 U11.31
RA17: J13.18 U11.30 U15.P3
RA18: J14.3 U11.35
RA19: J13.20 R21.2 S5.4 U11.32
RA20: J13.5 R17.1 U11.12
RA21: J13.6 U11.13
RA22: J13.9 U11.19
RA23: J13.10 U11.20
RA24: J19.19 U16.31
RA25: J19.18 U16.30 U20.P3
RA26: J20.3 U16.35
RA27: J19.20 R29.2 S7.4 U16.32
RA28: J19.5 R25.1 U16.12
RA29: J19.6 U16.13
RA30: J19.9 U16.19
RA31: J19.10 U16.20
RA32: J25.19 U21.31
RA33: J25.18 U21.30 U25.P3
RA34: J26.3 U21.35
RA35: J25.20 R37.2 S9.4 U21.32
RA36: J25.5 R33.1 U21.12
RA37: J25.6 U21.13
RA38: J25.9 U21.19
RA39: J25.10 U21.20
RB0: ICSP.4 J1.11 U1.21
RB1: ICSP.5 J1.12 U1.22
RB2: J1.13 U1.23
RB3: J1.14 U1.24
RB4: J2.1 U1.33
RB5: J4.4 U5.11
RB6: J4.8 U5.15
RB7: J2.8 U1.43
RB8: ICSP1.5 J4.12 U5.22
RB9: ICSP1.4 J4.11 U5.21
RB10: J8.8 U5.43
RB11: J4.14 U5.24
RB12: J4.13 U5.23
RB13: J1.4 U1.11
RB14: J8.1 U5.33
RB15: J1.8 U1.15
RB16: J13.4 U11.11
RB17: J13.8 U11.15
RB18: ICSP2.5 J13.12 U11.22
RB19: ICSP2.4 J13.11 U11.21
RB20: J14.8 U11.43
RB21: J13.14 U11.24
RB22: J13.13 U11.23
RB23: J14.1 U11.33
RB24: J19.4 U16.11
RB25: J19.8 U16.15
RB26: ICSP3.5 J19.12 U16.22
RB27: ICSP3.4 J19.11 U16.21
RB28: J20.8 U16.43
RB29: J19.14 U16.24
RB30: J19.13 U16.23
RB31: J20.1 U16.33
RB32: J25.4 U21.11
RB33: J25.8 U21.15
RB34: ICSP4.5 J25.12 U21.22
RB35: ICSP4.4 J25.11 U21.21
RB36: J26.8 U21.43
RB37: J25.14 U21.24
RB38: J25.13 U21.23
RB39: J26.1 U21.33
RC0: J1.15 U1.25
RC1: J1.16 U1.26
RC2: J1.17 U1.27
RC3: J2.4 U1.36
RC4: J8.4 U5.36
RC5: J4.17 U5.27
RC6: J2.11 U1.2
RC7: J2.12 U1.3
RC8: J2.13 U1.4
RC9: J2.14 U1.5
RC10: J4.16 U5.26
RC11: J4.15 U5.25
RC12: J8.11 U5.2
RC13: J8.12 U5.3
RC14: J8.13 U5.4
RC15: J8.14 U5.5
RC16: J14.4 U11.36
RC17: J13.17 U11.27
RC18: J13.16 U11.26
RC19: J13.15 U11.25
RC20: J14.11 U11.2
RC21: J14.12 U11.3
RC22: J14.13 U11.4
RC23: J14.14 U11.5
RC24: J20.4 U16.36
RC25: J19.17 U16.27
RC26: J19.16 U16.26
RC27: J19.15 U16.25
RC28: J20.11 U16.2
RC29: J20.12 U16.3
RC30: J20.13 U16.4
RC31: J20.14 U16.5
RC32: J26.4 U21.36
RC33: J25.17 U21.27
RC34: J25.16 U21.26
RC35: J25.15 U21.25
RC36: J26.11 U21.2
RC37: J26.12 U21.3
RC38: J26.13 U21.4
RC39: J26.14 U21.5
RST_N: J2.6 U1.38 U3.P1 U6.10
RST_N1: J8.6 U5.38 U8.10 U9.P1
RST_N2: J14.6 U11.38 U13.10 U14.P1
RST_N3: J20.6 U16.38 U18.10 U19.P1
RST_N4: J26.6 U21.38 U23.10 U24.P1
USBID/RB1: J8.7 J11.ID R6.1 U5.41
USBID/RB2: J14.7 J17.ID R18.1 U11.41
USBID/RB3: J20.7 J23.ID R26.1 U16.41
USBID/RB4: J26.7 J29.ID R34.1 U21.41
USBID/RB5: J2.7 J3.ID R9.1 U1.41
VCAP: C4.1 C5.1 U1.7
VCAP1: C1.1 C21.1 U5.7
VCAP2: C27.1 C34.1 U11.7
VCAP3: C40.1 C47.1 U16.7
VCAP4: C53.1 C60.1 U21.7

## Tracks (layer width: path | path; a pad name or v marks a point on that pad's centre or on a via)
3.3V  (via drill 0.3)
  Top 0.178: 60.02,11.93 60.35,11.6 60.81,11.6 61.11,11.9 61.93,11.9 62.18,12.16 62.18,12.86 C10.1 | U1.28 51.36,16.88 v50.6,16.88 48.62,16.88 48.01,17.49 C9.1 | U1.17 58.62,16.22 58.62,17.03 v58.42,17.24 | U6.14 7.74,18.34 | 7.74,18.34 7.47,18.61 6.1,18.61 5.69,19.02 5.69,19.61 R4.2 | U1.40 51.51,8.2 50.5,8.2 | 50.5,8.2 C8.1 | 50.5,8.2 49.28,8.2 49.07,8.4 v49.07,9.21 | v8.89,18.61 8.01,18.61 7.74,18.34 | v11.63,17.09 11.6,17.12 C6.1 C12.1 | R10.1 15.15,7.88 16.41,6.62 18.08,6.62 | 18.08,6.62 20.98,6.62 ICSP.2 | v18.03,10.28 18.03,6.67 18.08,6.62 | U2.8 40.94,11.14 40.74,11.34 | 40.74,11.34 40.24,11.34 U3.P2 | 40.74,11.34 40.74,14.9 41.05,15.21 41.05,16.16 R1.1 41,16.2 v41,17.24 42.37,17.24 43.28,16.32 C14.2 43.47,15.34 43.48,15.36 45.04,15.36 U4.P4
  Top 0.203: U1.10 60.02,11.93 | U1.40 | v61.06,12.92 62.14,12.92 C10.1
  Top 0.406: v73.15,10.28 73.15,7.79 J2.18
  Route15 0.178: 50.6,17.24 v41,17.24 32.61,17.24 31.19,18.66 22.96,18.66 21.39,17.09 18.02,17.09 | 18.02,17.09 v11.63,17.09 10.41,17.09 v8.89,18.61 | 18.02,17.09 18.02,10.29 v18.03,10.28 | v49.07,9.21 58.22,9.21 61.06,12.05 v61.06,12.92
  Route15 0.406: J1.3 73.71,18.61 68.22,18.61 65.28,15.66 65.28,13.88 v65.33,13.83 65.33,12.97 | 65.33,12.97 66.65,11.65 71.78,11.65 v73.15,10.28 | 65.33,12.97 61.11,12.97 | 61.11,12.97 v61.06,12.92 | 61.11,12.97 61.11,14.54 v58.42,17.24 50.6,17.24 v50.6,16.88
  pour Top: 65.23,14.29 64.87,13.94 64.87,12 68.48,12 68.48,12.97 68.12,13.33 67.31,13.33 67.06,13.58 67.06,13.88 66.65,14.29
3.3V1  (via drill 0.3)
  Top 0.178: 60.02,30.09 60.35,29.76 60.81,29.76 61.11,30.06 61.93,30.06 62.18,30.32 62.18,31.02 C17.1 | U5.28 51.36,35.04 v50.6,35.04 48.62,35.04 48.01,35.65 C16.1 | U5.17 58.62,34.38 58.62,35.2 v58.42,35.4 | U8.14 7.74,36.5 | 7.74,36.5 7.47,36.77 6.1,36.77 5.69,37.18 5.69,37.77 R16.2 | U5.40 51.51,26.36 50.5,26.36 | 50.5,26.36 C15.1 | 50.5,26.36 49.28,26.36 49.07,26.56 v49.07,27.37 | v8.89,36.77 8.01,36.77 7.74,36.5 | v11.63,35.25 11.6,35.28 C25.1 C26.1 | R7.1 15.15,26.04 16.41,24.78 18.08,24.78 | 18.08,24.78 20.98,24.78 ICSP1.2 | v18.03,28.44 18.03,24.83 18.08,24.78 | U7.8 40.94,29.3 40.74,29.5 | 40.74,29.5 40.24,29.5 U9.P2 | 40.74,29.5 40.74,33.06 41.05,33.37 41.05,34.32 R13.1 41,34.36 v41,35.4 42.37,35.4 43.28,34.48 C20.2 43.47,33.51 43.48,33.52 45.04,33.52 U10.P4
  Top 0.203: U5.10 60.02,30.09 | U5.40 | v61.06,31.08 62.14,31.08 C17.1
  Top 0.406: v73.15,28.44 73.15,25.95 J8.18
  Route15 0.178: 50.6,35.4 v41,35.4 32.61,35.4 31.19,36.82 22.96,36.82 21.39,35.25 18.02,35.25 | 18.02,35.25 v11.63,35.25 10.41,35.25 v8.89,36.77 | 18.02,35.25 18.02,28.45 v18.03,28.44 | v49.07,27.37 58.22,27.37 61.06,30.22 v61.06,31.08
  Route15 0.406: J4.3 73.71,36.77 68.22,36.77 65.28,33.82 65.28,32.05 v65.33,31.99 65.33,31.13 | 65.33,31.13 66.65,29.81 71.78,29.81 v73.15,28.44 | 65.33,31.13 61.11,31.13 | 61.11,31.13 v61.06,31.08 | 61.11,31.13 61.11,32.71 v58.42,35.4 50.6,35.4 v50.6,35.04
  pour Top: 65.23,32.45 64.87,32.1 64.87,30.17 68.48,30.17 68.48,31.13 68.12,31.49 67.31,31.49 67.06,31.74 67.06,32.05 66.65,32.45
3.3V2  (via drill 0.3)
  Top 0.178: 60.02,48.25 60.35,47.92 60.81,47.92 61.11,48.23 61.93,48.23 62.18,48.48 62.18,49.18 C30.1 | U11.28 51.36,53.2 v50.6,53.2 48.62,53.2 48.01,53.81 C29.1 | U11.17 58.62,52.54 58.62,53.36 v58.42,53.56 | U13.14 7.74,54.66 | 7.74,54.66 7.47,54.93 6.1,54.93 5.69,55.34 5.69,55.93 R24.2 | U11.40 51.51,44.52 50.5,44.52 | 50.5,44.52 C28.1 | 50.5,44.52 49.28,44.52 49.07,44.72 v49.07,45.53 | v8.89,54.93 8.01,54.93 7.74,54.66 | v11.63,53.41 11.6,53.44 C38.1 C39.1 | R19.1 15.15,44.2 16.41,42.94 18.08,42.94 | 18.08,42.94 20.98,42.94 ICSP2.2 | v18.03,46.6 18.03,42.99 18.08,42.94 | U12.8 40.94,47.46 40.74,47.67 | 40.74,47.67 40.24,47.67 U14.P2 | 40.74,47.67 40.74,51.22 41.05,51.53 41.05,52.48 R21.1 41,52.52 v41,53.56 42.37,53.56 43.28,52.65 C33.2 43.47,51.67 43.48,51.68 45.04,51.68 U15.P4
  Top 0.203: U11.10 60.02,48.25 | U11.40 | v61.06,49.24 62.14,49.24 C30.1
  Top 0.406: v73.15,46.6 73.15,44.11 J14.18
  Route15 0.178: 50.6,53.56 v41,53.56 32.61,53.56 31.19,54.98 22.96,54.98 21.39,53.41 18.02,53.41 | 18.02,53.41 v11.63,53.41 10.41,53.41 v8.89,54.93 | 18.02,53.41 18.02,46.62 v18.03,46.6 | v49.07,45.53 58.22,45.53 61.06,48.38 v61.06,49.24
  Route15 0.406: J13.3 73.71,54.93 68.22,54.93 65.28,51.98 65.28,50.21 v65.33,50.16 65.33,49.29 | 65.33,49.29 66.65,47.97 71.78,47.97 v73.15,46.6 | 65.33,49.29 61.11,49.29 | 61.11,49.29 v61.06,49.24 | 61.11,49.29 61.11,50.87 v58.42,53.56 50.6,53.56 v50.6,53.2
  pour Top: 65.23,50.61 64.87,50.26 64.87,48.33 68.48,48.33 68.48,49.29 68.12,49.65 67.31,49.65 67.06,49.9 67.06,50.21 66.65,50.61
3.3V3  (via drill 0.3)
  Top 0.178: 60.02,66.41 60.35,66.08 60.81,66.08 61.11,66.39 61.93,66.39 62.18,66.64 62.18,67.34 C43.1 | U16.28 51.36,71.36 v50.6,71.36 48.62,71.36 48.01,71.97 C42.1 | U16.17 58.62,70.7 58.62,71.52 v58.42,71.72 | U18.14 7.74,72.82 | 7.74,72.82 7.47,73.09 6.1,73.09 5.69,73.5 5.69,74.09 R32.2 | U16.40 51.51,62.68 50.5,62.68 | 50.5,62.68 C41.1 | 50.5,62.68 49.28,62.68 49.07,62.88 v49.07,63.69 | v8.89,73.09 8.01,73.09 7.74,72.82 | v11.63,71.57 11.6,71.61 C51.1 C52.1 | R27.1 15.15,62.36 16.41,61.1 18.08,61.1 | 18.08,61.1 20.98,61.1 ICSP3.2 | v18.03,64.76 18.03,61.15 18.08,61.1 | U17.8 40.94,65.62 40.74,65.83 | 40.74,65.83 40.24,65.83 U19.P2 | 40.74,65.83 40.74,69.38 41.05,69.69 41.05,70.64 R29.1 41,70.68 v41,71.72 42.37,71.72 43.28,70.81 C46.2 43.47,69.83 43.48,69.84 45.04,69.84 U20.P4
  Top 0.203: U16.10 60.02,66.41 | U16.40 | v61.06,67.4 62.14,67.4 C43.1
  Top 0.406: v73.15,64.76 73.15,62.27 J20.18
  Route15 0.178: 50.6,71.72 v41,71.72 32.61,71.72 31.19,73.14 22.96,73.14 21.39,71.57 18.02,71.57 | 18.02,71.57 v11.63,71.57 10.41,71.57 v8.89,73.09 | 18.02,71.57 18.02,64.78 v18.03,64.76 | v49.07,63.69 58.22,63.69 61.06,66.54 v61.06,67.4
  Route15 0.406: J19.3 73.71,73.09 68.22,73.09 65.28,70.14 65.28,68.37 v65.33,68.32 65.33,67.45 | 65.33,67.45 66.65,66.13 71.78,66.13 v73.15,64.76 | 65.33,67.45 61.11,67.45 | 61.11,67.45 v61.06,67.4 | 61.11,67.45 61.11,69.03 v58.42,71.72 50.6,71.72 v50.6,71.36
  pour Top: 65.23,68.77 64.87,68.42 64.87,66.49 68.48,66.49 68.48,67.45 68.12,67.81 67.31,67.81 67.06,68.06 67.06,68.37 66.65,68.77
3.3V4  (via drill 0.3)
  Top 0.178: 60.02,84.57 60.35,84.24 60.81,84.24 61.11,84.55 61.93,84.55 62.18,84.8 62.18,85.5 C56.1 | U21.28 51.36,89.53 v50.6,89.53 48.62,89.53 48.01,90.14 C55.1 | U21.17 58.62,88.86 58.62,89.68 v58.42,89.88 | U23.14 7.74,90.98 | 7.74,90.98 7.47,91.25 6.1,91.25 5.69,91.66 5.69,92.25 R40.2 | U21.40 51.51,80.84 50.5,80.84 | 50.5,80.84 C54.1 | 50.5,80.84 49.28,80.84 49.07,81.04 v49.07,81.86 | v8.89,91.25 8.01,91.25 7.74,90.98 | v11.63,89.73 11.6,89.77 C64.1 C65.1 | R35.1 15.15,80.52 16.41,79.26 18.08,79.26 | 18.08,79.26 20.98,79.26 ICSP4.2 | v18.03,82.92 18.03,79.31 18.08,79.26 | U22.8 40.94,83.78 40.74,83.99 | 40.74,83.99 40.24,83.99 U24.P2 | 40.74,83.99 40.74,87.54 41.05,87.85 41.05,88.8 R37.1 41,88.84 v41,89.88 42.37,89.88 43.28,88.97 C59.2 43.47,87.99 43.48,88 45.04,88 U25.P4
  Top 0.203: U21.10 60.02,84.57 | U21.40 | v61.06,85.56 62.14,85.56 C56.1
  Top 0.406: v73.15,82.92 73.15,80.43 J26.18
  Route15 0.178: 50.6,89.88 v41,89.88 32.61,89.88 31.19,91.3 22.96,91.3 21.39,89.73 18.02,89.73 | 18.02,89.73 v11.63,89.73 10.41,89.73 v8.89,91.25 | 18.02,89.73 18.02,82.94 v18.03,82.92 | v49.07,81.86 58.22,81.86 61.06,84.7 v61.06,85.56
  Route15 0.406: J25.3 73.71,91.25 68.22,91.25 65.28,88.31 65.28,86.53 v65.33,86.48 65.33,85.61 | 65.33,85.61 66.65,84.29 71.78,84.29 v73.15,82.92 | 65.33,85.61 61.11,85.61 | 61.11,85.61 v61.06,85.56 | 61.11,85.61 61.11,87.19 v58.42,89.88 50.6,89.88 v50.6,89.53
  pour Top: 65.23,86.93 64.87,86.58 64.87,84.65 68.48,84.65 68.48,85.61 68.12,85.97 67.31,85.97 67.06,86.22 67.06,86.53 66.65,86.93
5V  (via drill 0.3, 0.7, 0.9)
  Top 0.178: C7.2 36.93,11.29 v37.08,11.14 37.08,10.38 37.39,10.07 U2.1 | 53.87,8.73 v53.09,7.94
  Top 0.203: U1.42 53.87,8.73
  Top 0.406: C11.+ 81.84,14.03 v82.8,15 | J3.VBUS 84.86,8.16 v84.53,7.84
  Route15 0.178: v37.08,11.14 37.08,7.89 37.03,7.84 | v53.09,7.94 53.09,7.84
  Route15 0.406: 78.94,17.24 80.72,19.02 J1.1 | J2.20 80.72,7.84 | 81.99,14.09 81.99,14.19
  Route15 0.61: 81.99,14.19 78.94,17.24 v71.83,17.24
  Route15 1.27: J6.P1 84.99,17.19 v82.8,15 81.99,14.19 | 81.99,14.09 81.99,7.84 | 81.99,7.84 80.72,7.84 53.09,7.84 37.03,7.84 31.19,7.84 J7.4 29.92,9.16 29.57,9.52 21.22,9.52 J5.4 | 81.99,7.84 v84.53,7.84
  Bottom 0.406: 87.88,17.19 J6.P1
  Bottom 1.27: 89.81,17.19 87.88,17.19
  other vias: 71.12,13.78 69.65,17.75 69.65,13.78
  pour Top (rank 3): 66.8,12.97 71.83,12.97 71.83,14.04 73.91,16.12 76.91,16.12 76.96,16.17 76.96,18.56 66.75,18.56
  pour Bottom: 66.04,18.61 66.04,12.92 71.83,12.97 71.83,14.04 74.37,16.58 74.37,18.61
5V1  (via drill 0.3, 0.7, 0.9)
  Top 0.178: C22.2 36.93,29.45 v37.08,29.3 37.08,28.54 37.39,28.23 U7.1 | 53.87,26.89 v53.09,26.1
  Top 0.203: U5.42 53.87,26.89
  Top 0.406: C23.+ 81.84,32.19 v82.8,33.16 | J11.VBUS 84.86,26.33 v84.53,26
  Route15 0.178: v37.08,29.3 37.08,26.05 37.03,26 | v53.09,26.1 53.09,26
  Route15 0.406: 78.94,35.4 80.72,37.18 J4.1 | J8.20 80.72,26 | 81.99,32.25 81.99,32.35
  Route15 0.61: 81.99,32.35 78.94,35.4 v71.83,35.4
  Route15 1.27: J12.P1 84.99,35.35 v82.8,33.16 81.99,32.35 | 81.99,32.25 81.99,26 | 81.99,26 80.72,26 53.09,26 37.03,26 31.19,26 J10.4 29.92,27.32 29.57,27.68 21.22,27.68 J9.4 | 81.99,26 v84.53,26
  Bottom 0.406: 87.88,35.35 J12.P1
  Bottom 1.27: 89.81,35.35 87.88,35.35
  other vias: 71.12,31.94 69.65,35.91 69.65,31.94
  pour Top (rank 3): 66.8,31.13 71.83,31.13 71.83,32.2 73.91,34.28 76.91,34.28 76.96,34.33 76.96,36.72 66.75,36.72
  pour Bottom: 66.04,36.77 66.04,31.08 71.83,31.13 71.83,32.2 74.37,34.74 74.37,36.77
5V2  (via drill 0.3, 0.7, 0.9)
  Top 0.178: C35.2 36.93,47.62 v37.08,47.46 37.08,46.7 37.39,46.4 U12.1 | 53.87,45.05 v53.09,44.26
  Top 0.203: U11.42 53.87,45.05
  Top 0.406: C36.+ 81.84,50.35 v82.8,51.32 | J17.VBUS 84.86,44.49 v84.53,44.16
  Route15 0.178: v37.08,47.46 37.08,44.21 37.03,44.16 | v53.09,44.26 53.09,44.16
  Route15 0.406: 78.94,53.56 80.72,55.34 J13.1 | J14.20 80.72,44.16 | 81.99,50.41 81.99,50.51
  Route15 0.61: 81.99,50.51 78.94,53.56 v71.83,53.56
  Route15 1.27: J18.P1 84.99,53.51 v82.8,51.32 81.99,50.51 | 81.99,50.41 81.99,44.16 | 81.99,44.16 80.72,44.16 53.09,44.16 37.03,44.16 31.19,44.16 J16.4 29.92,45.48 29.57,45.84 21.22,45.84 J15.4 | 81.99,44.16 v84.53,44.16
  Bottom 0.406: 87.88,53.51 J18.P1
  Bottom 1.27: 89.81,53.51 87.88,53.51
  other vias: 71.12,50.1 69.65,54.07 69.65,50.1
  pour Top (rank 3): 66.8,49.29 71.83,49.29 71.83,50.36 73.91,52.44 76.91,52.44 76.96,52.49 76.96,54.88 66.75,54.88
  pour Bottom: 66.04,54.93 66.04,49.24 71.83,49.29 71.83,50.36 74.37,52.9 74.37,54.93
5V3  (via drill 0.3, 0.7, 0.9)
  Top 0.178: C48.2 36.93,65.78 v37.08,65.62 37.08,64.86 37.39,64.56 U17.1 | 53.87,63.21 v53.09,62.42
  Top 0.203: U16.42 53.87,63.21
  Top 0.406: C49.+ 81.84,68.52 v82.8,69.48 | J23.VBUS 84.86,62.65 v84.53,62.32
  Route15 0.178: v37.08,65.62 37.08,62.37 37.03,62.32 | v53.09,62.42 53.09,62.32
  Route15 0.406: 78.94,71.72 80.72,73.5 J19.1 | J20.20 80.72,62.32 | 81.99,68.57 81.99,68.67
  Route15 0.61: 81.99,68.67 78.94,71.72 v71.83,71.72
  Route15 1.27: J24.P1 84.99,71.67 v82.8,69.48 81.99,68.67 | 81.99,68.57 81.99,62.32 | 81.99,62.32 80.72,62.32 53.09,62.32 37.03,62.32 31.19,62.32 J22.4 29.92,63.64 29.57,64 21.22,64 J21.4 | 81.99,62.32 v84.53,62.32
  Bottom 0.406: 87.88,71.67 J24.P1
  Bottom 1.27: 89.81,71.67 87.88,71.67
  other vias: 71.12,68.27 69.65,72.23 69.65,68.27
  pour Top (rank 3): 66.8,67.45 71.83,67.45 71.83,68.52 73.91,70.6 76.91,70.6 76.96,70.65 76.96,73.04 66.75,73.04
  pour Bottom: 66.04,73.09 66.04,67.4 71.83,67.45 71.83,68.52 74.37,71.06 74.37,73.09
5V4  (via drill 0.3, 0.7, 0.9)
  Top 0.178: C61.2 36.93,83.94 v37.08,83.78 37.08,83.02 37.39,82.72 U22.1 | U21.42 v53.09,80.58
  Top 0.203: U21.42
  Top 0.406: C62.+ 81.84,86.68 v82.8,87.65 | J29.VBUS 84.86,80.81 v84.53,80.48
  Route15 0.178: v37.08,83.78 37.08,80.53 37.03,80.48 | v53.09,80.58 53.09,80.48
  Route15 0.406: 78.94,89.88 80.72,91.66 J25.1 | J26.20 80.72,80.48 | 81.99,86.73 81.99,86.83
  Route15 0.61: 81.99,86.83 78.94,89.88 v71.83,89.88
  Route15 1.27: J30.P1 84.99,89.83 v82.8,87.65 81.99,86.83 | 81.99,86.73 81.99,80.48 | 81.99,80.48 80.72,80.48 53.09,80.48 37.03,80.48 31.19,80.48 J28.4 29.92,81.8 29.57,82.16 21.22,82.16 J27.4 | 81.99,80.48 v84.53,80.48
  Bottom 0.406: 87.88,89.83 J30.P1
  Bottom 1.27: 89.81,89.83 87.88,89.83
  other vias: 71.12,86.43 69.65,90.39 69.65,86.43
  pour Top (rank 3): 66.8,85.61 71.83,85.61 71.83,86.68 73.91,88.76 76.91,88.76 76.96,88.81 76.96,91.2 66.75,91.2
  pour Bottom: 66.04,91.25 66.04,85.56 71.83,85.61 71.83,86.68 74.37,89.22 74.37,91.25
!MCLR!  (via drill 0.3)
  Top 0.178: v56.85,15.36 U1.18 | v72.09,9.11 72.09,6.32 J2.17 | C2.2 R10.2 17.41,6.18 18.29,5.3 ICSP.1 | v48.36,13.02 48.36,12.51 47.04,11.19 43.59,11.19 43.38,10.99 43.38,10.43 S2.4
  Top 0.203: v56.85,15.36
  Bottom 0.178: v72.09,9.11 71.78,8.8 67.51,8.8 65.89,7.18 56.64,7.18 55.98,7.84 55.98,14.49 v56.85,15.36 55.78,16.42 52.58,16.42 49.17,13.02 v48.36,13.02 47.65,13.02 46.38,11.75 41.35,11.75 38.3,8.7 32.11,8.7 30.48,7.08 28.24,7.08 27.79,6.62 21.08,6.62 ICSP.1
!MCLR!1  (via drill 0.3)
  Top 0.178: v56.85,33.52 U5.18 | v72.09,27.27 72.09,24.48 J8.17 | C24.2 R7.2 17.41,24.34 18.29,23.46 ICSP1.1 | v48.36,31.18 48.36,30.67 47.04,29.35 43.59,29.35 43.38,29.15 43.38,28.59 S4.4
  Top 0.203: v56.85,33.52
  Bottom 0.178: v72.09,27.27 71.78,26.96 67.51,26.96 65.89,25.34 56.64,25.34 55.98,26 55.98,32.66 v56.85,33.52 55.78,34.59 52.58,34.59 49.17,31.18 v48.36,31.18 47.65,31.18 46.38,29.91 41.35,29.91 38.3,26.86 32.11,26.86 30.48,25.24 28.24,25.24 27.79,24.78 21.08,24.78 ICSP1.1
!MCLR!2  (via drill 0.3)
  Top 0.178: v56.85,51.68 U11.18 | v72.09,45.43 72.09,42.64 J14.17 | C37.2 R19.2 17.41,42.5 18.29,41.62 ICSP2.1 | v48.36,49.34 48.36,48.84 47.04,47.51 43.59,47.51 43.38,47.31 43.38,46.76 S6.4
  Top 0.203: v56.85,51.68
  Bottom 0.178: v72.09,45.43 71.78,45.13 67.51,45.13 65.89,43.5 56.64,43.5 55.98,44.16 55.98,50.82 v56.85,51.68 55.78,52.75 52.58,52.75 49.17,49.34 v48.36,49.34 47.65,49.34 46.38,48.07 41.35,48.07 38.3,45.02 32.11,45.02 30.48,43.4 28.24,43.4 27.79,42.94 21.08,42.94 ICSP2.1
!MCLR!3  (via drill 0.3)
  Top 0.178: v56.85,69.84 U16.18 | v72.09,63.59 72.09,60.8 J20.17 | C50.2 R27.2 17.41,60.66 18.29,59.78 ICSP3.1 | v48.36,67.5 48.36,67 47.04,65.67 43.59,65.67 43.38,65.47 43.38,64.92 S8.4
  Top 0.203: v56.85,69.84
  Bottom 0.178: v72.09,63.59 71.78,63.29 67.51,63.29 65.89,61.66 56.64,61.66 55.98,62.32 55.98,68.98 v56.85,69.84 55.78,70.91 52.58,70.91 49.17,67.5 v48.36,67.5 47.65,67.5 46.38,66.23 41.35,66.23 38.3,63.19 32.11,63.19 30.48,61.56 28.24,61.56 27.79,61.1 21.08,61.1 ICSP3.1
!MCLR!4  (via drill 0.3)
  Top 0.178: v56.85,88.01 U21.18 | v72.09,81.75 72.09,78.96 J26.17 | C63.2 R35.2 17.41,78.82 18.29,77.94 ICSP4.1 | v48.36,85.67 48.36,85.16 47.04,83.84 43.59,83.84 43.38,83.63 43.38,83.08 S10.4
  Top 0.203: v56.85,88 v56.85,88.01
  Bottom 0.178: v72.09,81.75 71.78,81.45 67.51,81.45 65.89,79.82 56.64,79.82 55.98,80.48 55.98,87.14 v56.85,88 55.78,89.07 52.58,89.07 49.17,85.67 v48.36,85.67 47.65,85.67 46.38,84.39 41.35,84.39 38.3,81.35 32.11,81.35 30.48,79.72 28.24,79.72 27.79,79.26 21.08,79.26 ICSP4.1
BT_MODE  (via drill 0.3)
  Top 0.178: v52.78,12.87 52.78,12.21 51.58,11.01 | J2.5 42.62,5.35 41.35,6.62 23.52,6.62 v22.3,7.84 | v5.33,18.51 U6.16
  Top 0.203: U1.37 51.58,11.01
  Bottom 0.178: J2.5 43.28,5.96 43.48,5.96 44.09,6.57 45.26,6.57 46.13,7.43 50.09,7.43 51.46,8.8 51.46,11.55 v52.78,12.87 | v22.3,7.84 22.3,8.55 20.83,10.02 19.46,10.02 18.29,11.19 18.29,12.11 12.4,18 5.84,18 v5.33,18.51
BT_MODE1  (via drill 0.3)
  Top 0.178: v52.78,31.03 52.78,30.37 51.58,29.17 | J8.5 42.62,23.51 41.35,24.78 23.52,24.78 v22.3,26 | v5.33,36.67 U8.16
  Top 0.203: U5.37 51.58,29.17
  Bottom 0.178: J8.5 43.28,24.12 43.48,24.12 44.09,24.73 45.26,24.73 46.13,25.59 50.09,25.59 51.46,26.96 51.46,29.71 v52.78,31.03 | v22.3,26 22.3,26.71 20.83,28.18 19.46,28.18 18.29,29.35 18.29,30.27 12.4,36.16 5.84,36.16 v5.33,36.67
BT_MODE2  (via drill 0.3)
  Top 0.178: v52.78,49.19 52.78,48.53 51.58,47.33 | J14.5 42.62,41.67 41.35,42.94 23.52,42.94 v22.3,44.16 | v5.33,54.83 U13.16
  Top 0.203: U11.37 51.58,47.33
  Bottom 0.178: J14.5 43.28,42.28 43.48,42.28 44.09,42.89 45.26,42.89 46.13,43.76 50.09,43.76 51.46,45.13 51.46,47.87 v52.78,49.19 | v22.3,44.16 22.3,44.87 20.83,46.34 19.46,46.34 18.29,47.51 18.29,48.43 12.4,54.32 5.84,54.32 v5.33,54.83
BT_MODE3  (via drill 0.3)
  Top 0.178: v52.78,67.35 52.78,66.69 51.58,65.49 | J20.5 42.62,59.83 41.35,61.1 23.52,61.1 v22.3,62.32 | v5.33,72.99 U18.16
  Top 0.203: U16.37 51.58,65.49
  Bottom 0.178: J20.5 43.28,60.44 43.48,60.44 44.09,61.05 45.26,61.05 46.13,61.92 50.09,61.92 51.46,63.29 51.46,66.03 v52.78,67.35 | v22.3,62.32 22.3,63.03 20.83,64.51 19.46,64.51 18.29,65.67 18.29,66.59 12.4,72.48 5.84,72.48 v5.33,72.99
BT_MODE4  (via drill 0.3)
  Top 0.178: v52.78,85.51 52.78,84.85 51.58,83.65 | J26.5 42.62,77.99 41.35,79.26 23.52,79.26 v22.3,80.48 | v5.33,91.15 U23.16
  Top 0.203: U21.37 51.58,83.65
  Bottom 0.178: J26.5 43.28,78.6 43.48,78.6 44.09,79.21 45.26,79.21 46.13,80.08 50.09,80.08 51.46,81.45 51.46,84.19 v52.78,85.51 | v22.3,80.48 22.3,81.19 20.83,82.67 19.46,82.67 18.29,83.84 18.29,84.75 12.4,90.64 5.84,90.64 v5.33,91.15
BT_RX  (via drill 0.3)
  Top 0.178: 55.88,7.78 55.85,7.76 | 55.85,7.76 55.32,7.23 J2.10 | U6.7 v13.56,11.15 v13.56,11.14 | U1.1 55.85,7.76
  Top 0.203: 55.88,7.79 55.88,7.78
  Route15 0.178: J2.10 53.7,6.92 19.05,6.92 16.81,9.16 16.81,10.33 16,11.14 v13.56,11.14
BT_RX1  (via drill 0.3)
  Top 0.178: 55.88,25.95 55.85,25.92 | 55.85,25.92 55.32,25.39 J8.10 | U8.7 v13.56,29.31 v13.56,29.3 | U5.1 55.85,25.92
  Top 0.203: 55.88,25.95
  Route15 0.178: J8.10 53.7,25.09 19.05,25.09 16.81,27.32 16.81,28.49 16,29.3 v13.56,29.3
BT_RX2  (via drill 0.3)
  Top 0.178: 55.88,44.11 55.85,44.08 | 55.85,44.08 55.32,43.55 J14.10 | U13.7 v13.56,47.47 v13.56,47.46 | U11.1 55.85,44.08
  Top 0.203: 55.88,44.11
  Route15 0.178: J14.10 53.7,43.25 19.05,43.25 16.81,45.48 16.81,46.65 16,47.46 v13.56,47.46
BT_RX3  (via drill 0.3)
  Top 0.178: 55.88,62.27 55.85,62.24 | 55.85,62.24 55.32,61.71 J20.10 | U18.7 13.56,65.63 v13.56,65.62 | U16.1 55.85,62.24
  Top 0.203: 55.88,62.27
  Route15 0.178: J20.10 53.7,61.41 19.05,61.41 16.81,63.64 16.81,64.81 16,65.62 v13.56,65.62
BT_RX4  (via drill 0.3)
  Top 0.178: 55.88,80.43 55.85,80.4 | 55.85,80.4 55.32,79.87 J26.10 | U23.7 13.56,83.79 v13.56,83.78 | U21.1 55.85,80.4
  Top 0.203: 55.88,80.44 55.88,80.43
  Route15 0.178: J26.10 53.7,79.57 19.05,79.57 16.81,81.8 16.81,82.97 16,83.78 v13.56,83.78
BT_TX  (via drill 0.3)
  Top 0.178: 54.68,7.71 54.41,7.43 54.41,6.92 J2.9 | U6.8 13.27,12.35 v15.7,9.92 | 54.79,7.71 U1.44
  Top 0.203: 54.79,7.71 54.68,7.71
  Route15 0.178: J2.9 51.56,6.52 18.54,6.52 15.7,9.36 v15.7,9.92
BT_TX1  (via drill 0.3)
  Top 0.178: 54.68,25.87 54.41,25.59 54.41,25.09 J8.9 | U8.8 13.27,30.51 v15.7,28.08 | 54.79,25.87 U5.44
  Top 0.203: 54.79,25.87 54.68,25.87
  Route15 0.178: J8.9 51.56,24.68 18.54,24.68 15.7,27.52 v15.7,28.08
BT_TX2  (via drill 0.3)
  Top 0.178: 54.68,44.03 54.41,43.76 54.41,43.25 J14.9 | U13.8 13.27,48.67 v15.7,46.24 | 54.79,44.03 U11.44
  Top 0.203: 54.79,44.03 54.68,44.03
  Route15 0.178: J14.9 51.56,42.84 18.54,42.84 15.7,45.69 v15.7,46.24
BT_TX3  (via drill 0.3)
  Top 0.178: 54.68,62.19 54.41,61.92 54.41,61.41 J20.9 | U18.8 13.27,66.83 v15.7,64.41 | 54.79,62.19 U16.44
  Top 0.203: 54.79,62.19 54.68,62.19
  Route15 0.178: J20.9 51.56,61 18.54,61 15.7,63.85 v15.7,64.41
BT_TX4  (via drill 0.3)
  Top 0.178: 54.68,80.35 54.41,80.08 54.41,79.57 J26.9 | U23.8 13.27,84.99 v15.7,82.57 | 54.79,80.35 U21.44
  Top 0.203: 54.79,80.35 54.68,80.35
  Route15 0.178: J26.9 51.56,79.16 18.54,79.16 15.7,82.01 v15.7,82.57
D+/RB1  (via drill 0.3)
  Top 0.178: U5.8 59.74,28.49 61.67,28.49 v61.87,28.29 | J11.D+ 84.89,27.63 v84.79,27.73 | v69.65,28.13 69.65,25.09 J8.15
  Top 0.203: U5.8
  Bottom 0.178: v61.87,28.29 62.13,28.54 69.24,28.54 v69.65,28.13 | v84.79,27.73 84.48,28.03 83.52,28.03 81.38,25.9 70.46,25.9 J8.15
D+/RB2  (via drill 0.3)
  Top 0.178: U11.8 59.74,46.65 61.67,46.65 v61.87,46.45 | J17.D+ 84.89,45.79 v84.79,45.89 | v69.65,46.3 69.65,43.25 J14.15
  Top 0.203: U11.8
  Bottom 0.178: v61.87,46.45 62.13,46.7 69.24,46.7 v69.65,46.3 | v84.79,45.89 84.48,46.19 83.52,46.19 81.38,44.06 70.46,44.06 J14.15
D+/RB3  (via drill 0.3)
  Top 0.178: U16.8 59.74,64.81 61.67,64.81 v61.87,64.61 | J23.D+ 84.89,63.95 v84.79,64.05 | v69.65,64.46 69.65,61.41 J20.15
  Top 0.203: U16.8
  Bottom 0.178: v61.87,64.61 62.13,64.86 69.24,64.86 v69.65,64.46 | v84.79,64.05 84.48,64.35 83.52,64.35 81.38,62.22 70.46,62.22 J20.15
D+/RB4  (via drill 0.3)
  Top 0.178: U21.8 59.74,82.97 61.67,82.97 v61.87,82.77 | J29.D+ 84.89,82.11 v84.79,82.21 | v69.65,82.62 69.65,79.57 J26.15
  Top 0.203: U21.8
  Bottom 0.178: v61.87,82.77 62.13,83.02 69.24,83.02 v69.65,82.62 | v84.79,82.21 84.48,82.52 83.52,82.52 81.38,80.38 70.46,80.38 J26.15
D+/RB10  (via drill 0.3)
  Top 0.178: U1.8 59.74,10.33 61.67,10.33 v61.87,10.12 | J3.D+ 84.89,9.46 v84.79,9.57 | v69.65,9.97 69.65,6.92 J2.15
  Top 0.203: U1.8
  Bottom 0.178: v61.87,10.12 62.13,10.38 69.24,10.38 v69.65,9.97 | v84.79,9.57 84.48,9.87 83.52,9.87 81.38,7.74 70.46,7.74 J2.15
D-/RB1  (via drill 0.3)
  Top 0.178: 59.56,29.63 59.94,29.25 v61.57,29.25 | J11.D- 84.22,26.98 v83.87,27.32 | v69.65,29 70.56,28.08 J8.16
  Top 0.203: U5.9 59.56,29.63
  Bottom 0.178: v61.57,29.25 61.82,29 v69.65,29 | v83.87,27.32 82.04,25.49 72.59,25.49 J8.16
D-/RB2  (via drill 0.3)
  Top 0.178: 59.56,47.79 59.94,47.41 v61.57,47.41 | J17.D- 84.22,45.14 v83.87,45.48 | v69.65,47.16 70.56,46.24 J14.16
  Top 0.203: U11.9 59.56,47.79
  Bottom 0.178: v61.57,47.41 61.82,47.16 v69.65,47.16 | v83.87,45.48 82.04,43.65 72.59,43.65 J14.16
D-/RB3  (via drill 0.3)
  Top 0.178: 59.56,65.95 59.94,65.57 v61.57,65.57 | J23.D- 84.22,63.3 v83.87,63.64 | v69.65,65.32 70.56,64.41 J20.16
  Top 0.203: U16.9 59.56,65.95
  Bottom 0.178: v61.57,65.57 61.82,65.32 v69.65,65.32 | v83.87,63.64 82.04,61.81 72.59,61.81 J20.16
D-/RB4  (via drill 0.3)
  Top 0.178: 59.56,84.11 59.94,83.73 v61.57,83.73 | J29.D- 84.22,81.46 v83.87,81.8 | v69.65,83.48 70.56,82.57 J26.16
  Top 0.203: U21.9 59.56,84.11
  Bottom 0.178: v61.57,83.73 61.82,83.48 v69.65,83.48 | v83.87,81.8 82.04,79.97 72.59,79.97 J26.16
D-/RB11  (via drill 0.3)
  Top 0.178: 59.56,11.47 59.94,11.09 v61.57,11.09 | J3.D- 84.22,8.81 v83.87,9.16 | v69.65,10.84 70.56,9.92 J2.16
  Top 0.203: U1.9 59.56,11.47
  Bottom 0.178: v61.57,11.09 61.82,10.84 v69.65,10.84 | v83.87,9.16 82.04,7.33 72.59,7.33 J2.16
GND  (via drill 0.3)
  Top 0.178: J3.GND 85.57,10.77
  Top 0.406: 85.57,10.77 84.79,11.55
  Bottom 0.406: 87.83,19.73 J6.P2
  Bottom 1.27: 89.81,19.73 87.83,19.73
  other vias: 57.3,10.99 57.61,14.65 53.49,10.73 52.83,14.44 63.86,11.9 64.52,9.52 75.03,10.02 84.38,12.11 73.1,11.95 69.9,12.31 65.23,16.88 64.01,14.04 10.11,12.31 14.58,18.41 14.53,19.93 6.55,7.18 5.44,12.06 42.01,18.15 45.01,9.21 38.15,12.92 56.69,13.27 26.37,8.3 41.76,13.43 46.18,12.61
  pour Top (isolate 0.254, rank 6): 4.52,21.97 4.52,3.81 90.88,3.81 90.88,21.97
  pour Route2: 4.52,21.97 90.88,21.97 90.88,3.81 4.52,3.81
  pour Route15: 4.52,21.97 90.88,21.97 90.88,3.81 4.52,3.81
  pour Bottom (isolate 0.254, rank 3): 4.52,3.81 4.52,21.97 90.88,21.97 90.88,3.81
GND1  (via drill 0.3)
  Top 0.178: J11.GND 85.57,28.93
  Top 0.406: 85.57,28.93 84.79,29.71
  Bottom 0.406: 87.83,37.89 J12.P2
  Bottom 1.27: 89.81,37.89 87.83,37.89
  other vias: 57.3,29.15 57.61,32.81 53.49,28.9 52.83,32.6 63.86,30.06 64.52,27.68 75.03,28.18 84.38,30.27 73.1,30.11 69.9,30.47 65.23,35.04 64.01,32.2 10.11,30.47 14.58,36.57 14.53,38.09 6.55,25.34 5.44,30.22 42.01,36.31 45.01,27.37 38.15,31.08 56.69,31.44 26.37,26.46 41.76,31.59 46.18,30.78
  pour Top (isolate 0.254, rank 6): 4.52,40.13 4.52,21.97 90.88,21.97 90.88,40.13
  pour Route2: 4.52,40.13 90.88,40.13 90.88,21.97 4.52,21.97
  pour Route15: 4.52,40.13 90.88,40.13 90.88,21.97 4.52,21.97
  pour Bottom (isolate 0.254, rank 3): 4.52,21.97 4.52,40.13 90.88,40.13 90.88,21.97
GND2  (via drill 0.3)
  Top 0.178: J17.GND 85.57,47.09
  Top 0.406: 85.57,47.09 84.79,47.87
  Bottom 0.406: 87.83,56.05 J18.P2
  Bottom 1.27: 89.81,56.05 87.83,56.05
  other vias: 57.3,47.31 57.61,50.97 53.49,47.06 52.83,50.77 63.86,48.23 64.52,45.84 75.03,46.35 84.38,48.43 73.1,48.28 69.9,48.63 65.23,53.2 64.01,50.36 10.11,48.63 14.58,54.73 14.53,56.25 6.55,43.5 5.44,48.38 42.01,54.47 45.01,45.53 38.15,49.24 56.69,49.6 26.37,44.62 41.76,49.75 46.18,48.94
  pour Top (isolate 0.254, rank 6): 4.52,58.29 4.52,40.13 90.88,40.13 90.88,58.29
  pour Route2: 4.52,58.29 90.88,58.29 90.88,40.13 4.52,40.13
  pour Route15: 4.52,58.29 90.88,58.29 90.88,40.13 4.52,40.13
  pour Bottom (isolate 0.254, rank 3): 4.52,40.13 4.52,58.29 90.88,58.29 90.88,40.13
GND3  (via drill 0.3)
  Top 0.178: J23.GND 85.57,65.25
  Top 0.406: 85.57,65.25 84.79,66.03
  Bottom 0.406: 87.83,74.21 J24.P2
  Bottom 1.27: 89.81,74.21 87.83,74.21
  other vias: 57.3,65.47 57.61,69.13 53.49,65.22 52.83,68.93 63.86,66.39 64.52,64 75.03,64.51 84.38,66.59 73.1,66.44 69.9,66.79 65.23,71.36 64.01,68.52 10.11,66.79 14.58,72.89 14.53,74.41 6.55,61.66 5.44,66.54 42.01,72.63 45.01,63.69 38.15,67.4 56.69,67.76 26.37,62.78 41.76,67.91 46.18,67.1
  pour Top (isolate 0.254, rank 6): 4.52,76.45 4.52,58.29 90.88,58.29 90.88,76.45
  pour Route2: 4.52,76.45 90.88,76.45 90.88,58.29 4.52,58.29
  pour Route15: 4.52,76.45 90.88,76.45 90.88,58.29 4.52,58.29
  pour Bottom (isolate 0.254, rank 3): 4.52,58.29 4.52,76.45 90.88,76.45 90.88,58.29
GND4  (via drill 0.3)
  Top 0.178: J29.GND 85.57,83.41
  Top 0.406: 85.57,83.41 84.79,84.19
  Bottom 0.406: 87.83,92.37 J30.P2
  Bottom 1.27: 89.81,92.37 87.83,92.37
  other vias: 57.3,83.63 57.61,87.29 53.49,83.38 52.83,87.09 63.86,84.55 64.52,82.16 75.03,82.67 84.38,84.75 73.1,84.6 69.9,84.95 65.23,89.53 64.01,86.68 10.11,84.95 14.58,91.05 14.53,92.57 6.55,79.82 5.44,84.7 42.01,90.8 45.01,81.85 38.15,85.56 56.69,85.92 26.37,80.94 41.76,86.07 46.18,85.26
  pour Top (isolate 0.254, rank 6): 4.52,94.61 4.52,76.45 90.88,76.45 90.88,94.61
  pour Route2: 4.52,94.61 90.88,94.61 90.88,76.45 4.52,76.45
  pour Route15: 4.52,94.61 90.88,94.61 90.88,76.45 4.52,76.45
  pour Bottom (isolate 0.254, rank 3): 4.52,76.45 4.52,94.61 90.88,94.61 90.88,76.45
LED_CLOCK  (via drill 0.3)
  Top 0.178: v60.55,17.69 60.35,17.49 60.35,15.21 59.53,14.38 U1.14 59.51,14.37 59.08,13.94 59.08,13.68 57.05,11.65 v55.17,11.65 | v43.69,9.31 43.43,9.06 U2.6
  Route15 0.178: v55.17,11.65 54.91,11.39 52.22,11.39 50.95,10.12 44.5,10.12 v43.69,9.31
  Bottom 0.178: v60.55,17.69 61.52,18.66 63.6,18.66 J1.7
LED_CLOCK1  (via drill 0.3)
  Top 0.178: v60.55,35.85 60.35,35.65 60.35,33.37 59.53,32.54 U5.14 59.51,32.53 59.08,32.1 59.08,31.84 57.05,29.81 v55.17,29.81 | v43.69,27.47 43.43,27.22 U7.6
  Route15 0.178: v55.17,29.81 54.91,29.56 52.22,29.56 50.95,28.29 44.5,28.29 v43.69,27.47